# Allegro board Smart210SDK(Tiny210V2SDK)-1305-PCB.brd
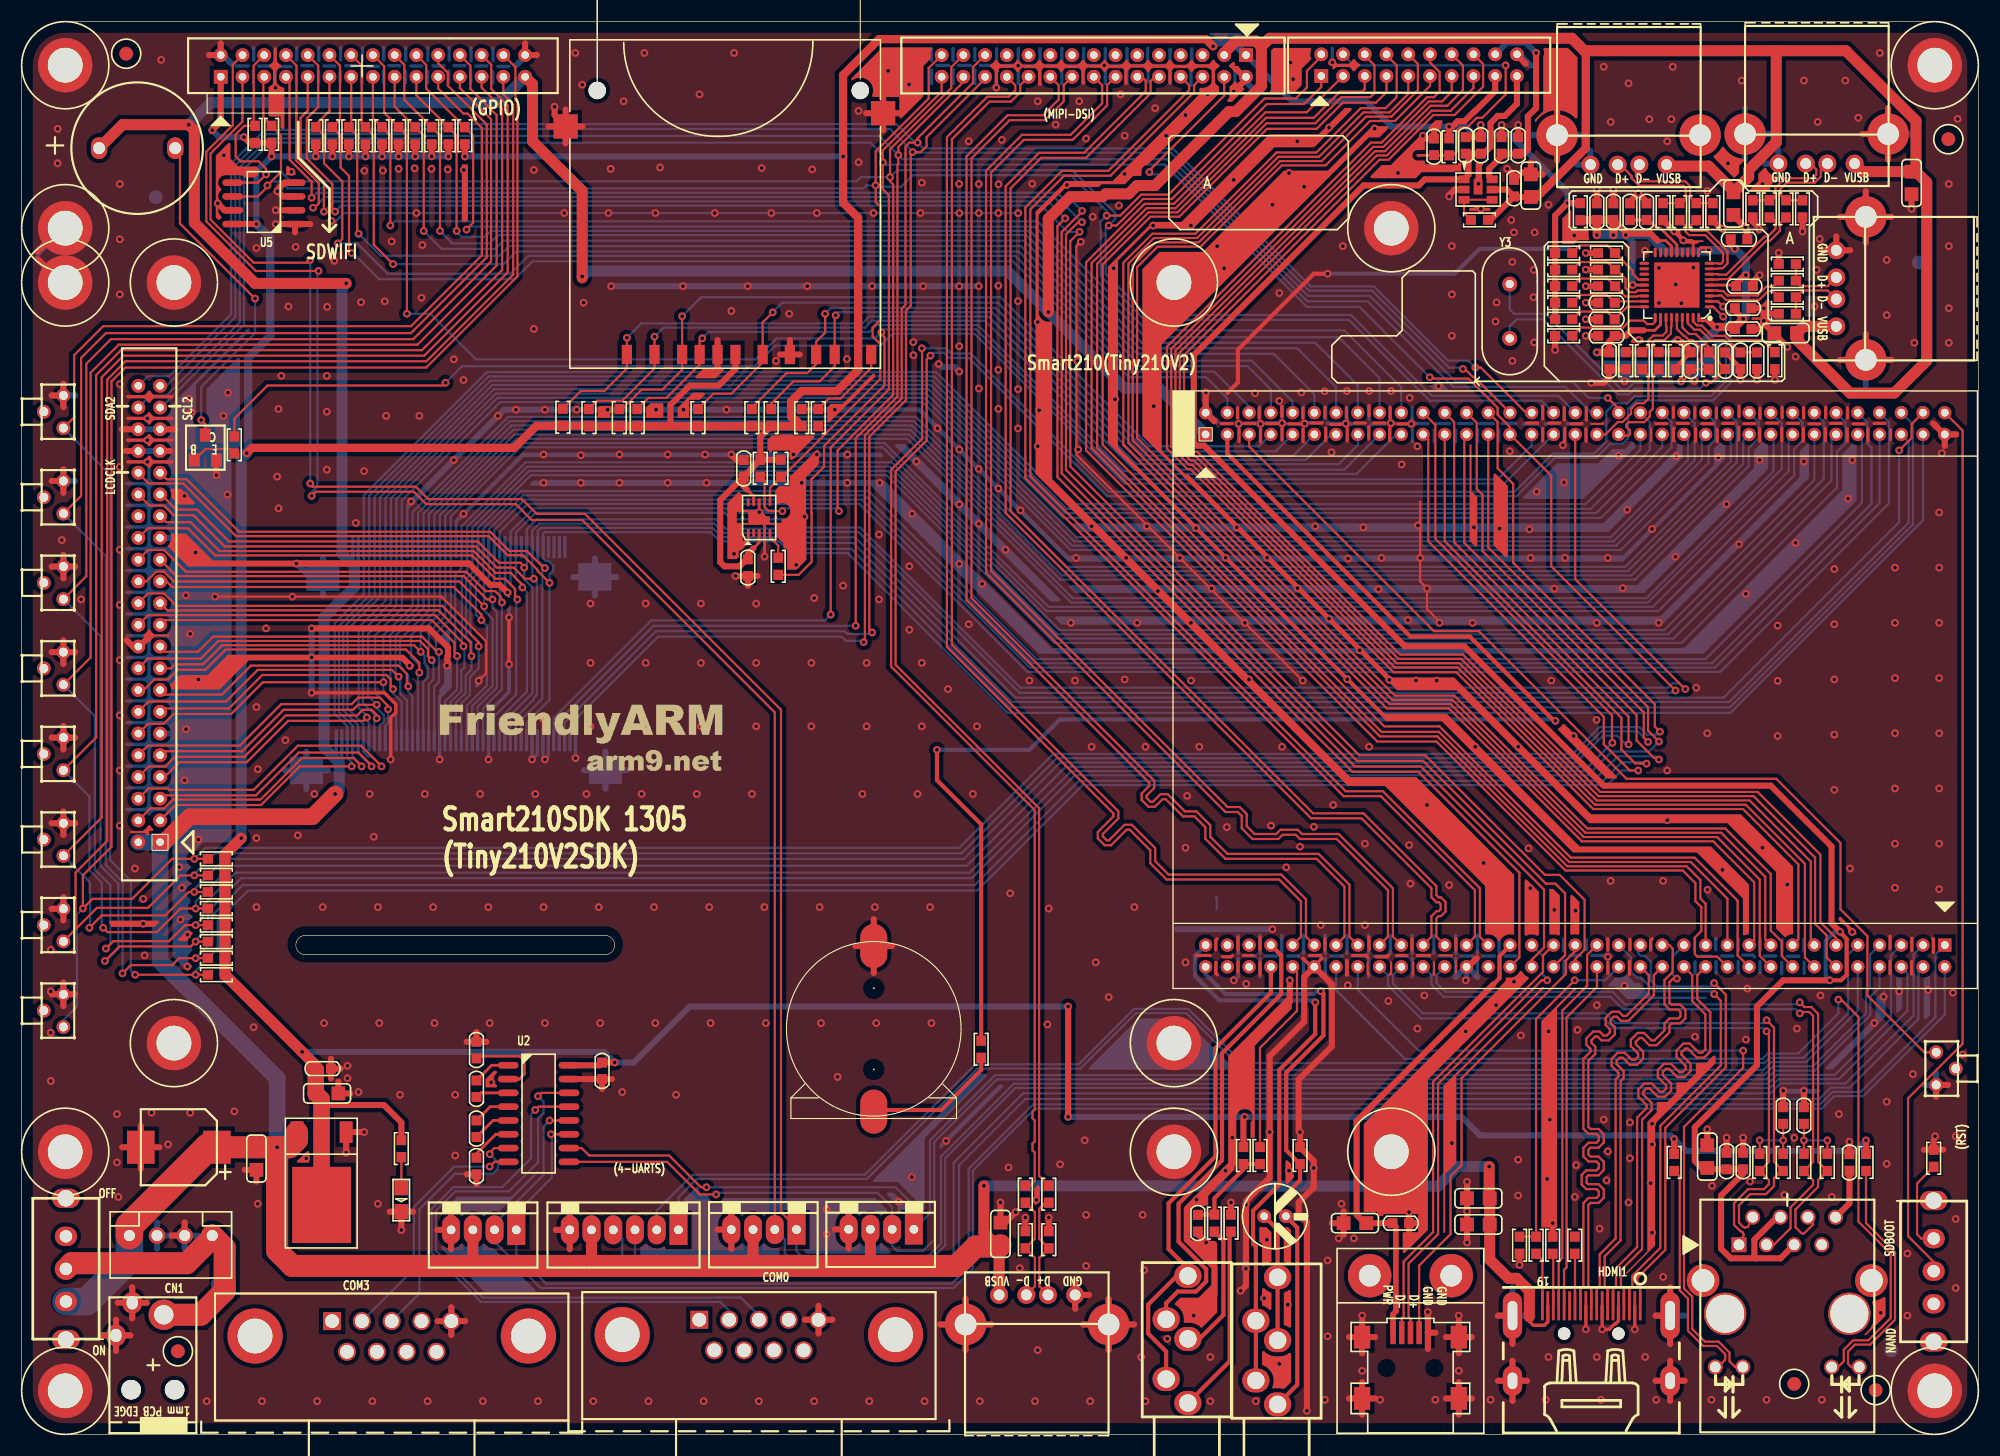
[diagram p0: board, top side]
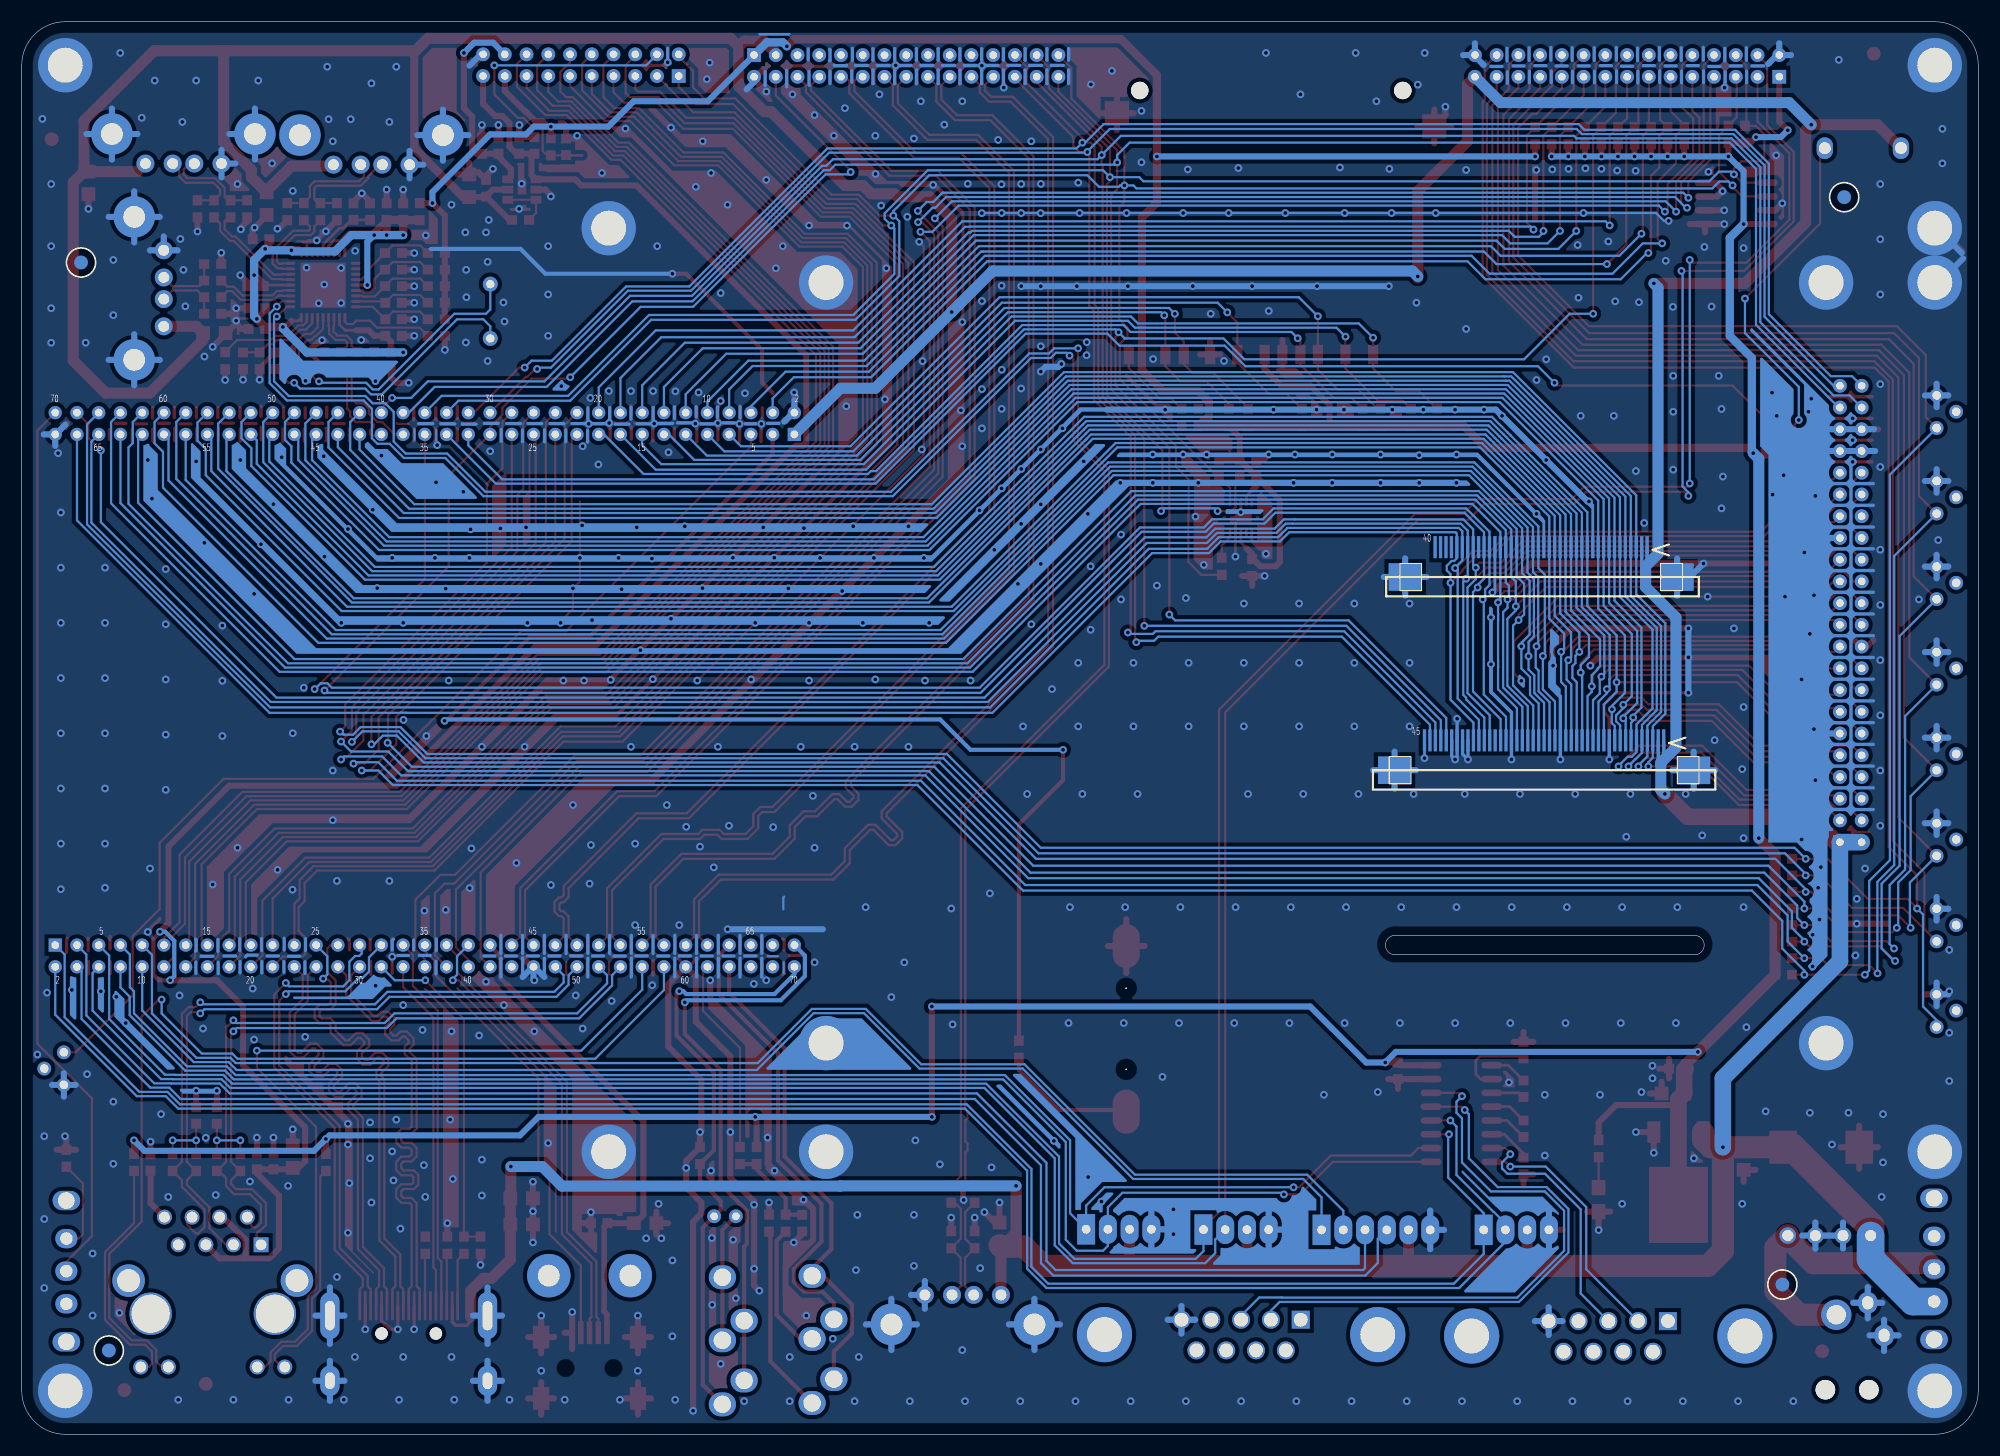
[diagram p1: board, bottom side, seen from below]

Outline 180 x 130 mm; copper layers: TOP, BOTTOM. Coordinates in mm from the lower left corner of the outline.
Outline path: 0,126 0,4 arc(1.17,1.17) 4,0 176,0 arc(178.83,1.17) 180,4 180,126 arc(178.83,128.83) 176,130 4,130 arc(1.17,128.83) 0,126 ; 26.01,45.91 53.57,45.91 arc(54.54,45.02) 53.57,44.13 26.01,44.13 arc(25.21,45.02) 26.01,45.91

## Design rules (mm)
net group DIFFPAIR50: nets XUODM XUODP
net group DIFFPAIR55: nets TD+ TD-
net group DIFFPAIR56: nets RX+ RX-
net group DM1-: nets DM1- N9765197
net group DM2-: nets DM2- N9764500
net group DM3-: nets DM3- N9764300
net group DM4-: nets DM4- N9764104
net group DP1+: nets DP1+ N9765225
net group DP2+: nets DP2+ N9764520
net group DP3+: nets DP3+ N9764304
net group DP4+: nets DP4+ N9764132
net group XUHDM: nets N9762804 XUHDM
net group XUHDP: nets N9762824 XUHDP
net group PWR: nets N9763008 VDD_1.8V VDD_2.8V VDD_3.3V VDD_5V

## Placement (name value [footprint] x y rotation side)
BT1  3V BATTERY  [BAT600]  78.38 29.69 180 top
BUZZER1  -  [SPEAKER]  7.37 118.36 0 top
C1  220uF/16V  [CAPSOP]  17.95 26.42 180 top
C2  10uF  [C0805]  21.59 26.42 270 top
C3  10uF  [C0805]  27.05 31.37 0 top
C4  104  [C0603]  26.92 33.66 0 top
C5  10uF  [C0805]  138.84 113.87 90 top
C6  104  [C0603]  137.29 113.92 90 top
C7  1uF  [C0603]  132.84 119.38 270 top
C8  104  [C0603]  134.24 119.38 270 top
C9  1uF  [C0603]  136.14 119.38 270 top
C10  104  [C0603]  137.67 119.38 270 top
C22  10uF  [C0805]  155.07 24.51 90 top
C23  104  [C0603]  156.84 24.38 90 top
C24  104  [C0603]  158.37 24.38 90 top
C25  104  [C0603]  162.05 28.57 90 top
C26  104  [C0603]  163.96 28.57 90 top
C27  104  [C0603]  168.15 24.26 90 top
C28  100pF  [C0603]  108.2 20.19 270 top
C29  104  [C0603]  66.8 80.52 270 top
C30  104  [C0603]  66.42 88.14 90 top
C51  10uF  [C0805]  123.7 19.43 180 top
C52  104  [C0603]  126.11 19.43 0 top
C54  104  [C0603]  41.83 28.88 270 top
C55  104  [C0603]  41.83 31.04 90 top
C56  104  [C0603]  41.83 36.12 270 top
C57  104  [C0603]  41.83 23.93 90 top
C58  104  [C0603]  53.39 32.69 90 top
C59  10uF  [C0805]  132.97 19.3 0 top
C60  10uF  [C0805]  132.97 21.72 0 top
C73  10u  [C0805]  90.04 17.4 90 top
C74  10u  [C0805]  157.48 114.3 270 top
C80  104  [C0603]  157.61 101.73 0 top
C81  33pF  [C0603]  153.54 98.04 90 top
C82  104  [C0603]  146.56 101.09 180 top
C83  104  [C0603]  146.56 104.14 180 top
C84  104  [C0603]  159.64 99.57 270 top
C85  104  [C0603]  146.56 102.62 180 top
C86  104  [C0603]  157.61 103.63 0 top
C87  104  [C0603]  144.91 111.76 90 top
C88  104  [C0603]  146.05 99.57 270 top
C89  104  [C0603]  157.73 105.66 0 top
C90  1uF  [C0603]  158.12 99.57 270 top
C91  104  [C0603]  149.48 111.76 90 top
C92  1uF  [C0603]  147.96 111.76 90 top
C93  1uF  [C0603]  146.43 111.76 90 top
C94  1uF  [C0603]  157.23 109.98 0 top
C95  33pF  [C0603]  156.72 98.04 90 top
C96  10u  [C0805]  173.86 116.2 270 top
C97  10u  [C0805]  163.32 101.35 180 top
C114  NC  [C0603]  129.92 119.25 270 top
CAMERA  CON20A  [IDC20S]  119.56 125 0 top
CN1  DC-JACK  [DC023B]  12.06 6.35 90 top
COM0  CONNECTOR DB9  [DB9RA_M]  67.82 10.54 90 top
COM3  CONNECTOR DB9  [DB9RA_M]  34.04 10.41 90 top
CON1  CON4  [SIP4-FA2]  46.58 18.81 180 top
CON2  CON6  [SIP6-FA2]  55.42 18.81 180 top
CON3  CON4  [SIP4-FA2]  72.36 18.84 180 top
CON4  CON4  [SIP4-FA2]  83.16 18.86 180 top
CON5  CON4  [CON4-B]  13.72 18.29 0 top
CON10  SD/MMC CARD  [SDCARD]  58.05 117.93 90 top
CON13  CON24A  [IDC30S]  98.63 125.93 180 top
CON14  CON20A  [SIP30S]  27.31 125.93 0 top
D1  LED_3.3  [LED]  34.92 22.69 270 top
H1  CON1  [H1]  4 4 0 top
H2  CON1  [H1]  4 126 0 top
H3  CON1  [H1]  176 126 0 top
H4  CON1  [H1]  176 4 0 top
H5  CON1  [H1]  4 26 0 top
H6  CON1  [H1]  106 26 0 top
H7  CON1  [H1]  4 106 0 top
H8  CON1  [H1]  4 111 0 top
H9  CON1  [H1]  14 36 0 top
H10  CON1  [H1]  14 106 0 top
H11  CON1  [H1]  106 36 0 top
H12  CON1  [H1]  126 26 0 top
H13  CON1  [H1]  106 106 0 top
H14  CON1  [H1]  126 111 0 top
HDMI1  HDMI-TypeA  [HDMI0119-20-RM-A]  144.4 9.27 0 top
K1  SW PUSHBUTTON  [KEY-A06]  2.03 94.11 270 top
K2  SW PUSHBUTTON  [KEY-A06]  2.03 86.23 270 top
K3  SW PUSHBUTTON  [KEY-A06]  2.03 78.36 270 top
K4  SW PUSHBUTTON  [KEY-A06]  2.03 70.48 270 top
K5  SW PUSHBUTTON  [KEY-A06]  2.03 62.61 270 top
K6  SW PUSHBUTTON  [KEY-A06]  2.03 54.74 270 top
K7  SW PUSHBUTTON  [KEY-A06]  2.03 46.86 270 top
K8  SW PUSHBUTTON  [KEY-A06]  2.03 38.99 270 top
K9  SW PUSHBUTTON  [KEY-A06]  177.93 33.66 90 top
LAN1  -  [HR911105A]  162.43 21.59 180 top
LCD1  LCD-888  [CON-FPC-P05-45P]  25.78 64.83 0 bottom
LCD2  LCD-888  [CON-FPC-P05-40P]  27.3 82.61 0 bottom
LCD4  CON44A  [IDC44S2]  11.56 74.04 90 top
MIC1  MIC  [MIC2]  114.3 20.07 0 top
MIC2  PHONEJACK STEREO SW  [EARJACK5]  115.44 15.62 270 top
MINIUSB1  USBOTG  [MINIUSB_ANT]  127.76 6.1 0 top
NOREF  -  [unnamed]  170.56 4.06 0 top
NOREF#2  -  [unnamed]  177.25 119.19 0 top
NOREF#3  -  [unnamed]  9.61 127.06 0 top
NOREF#4  -  [#2]  37.87 60.24 0 top
NOREF#5  -  [unnamed]  14.37 7.64 0 top
NOREF#6  -  [unnamed]  163.07 4.64 0 top
NOREF#7  -  [unnamed]  18.02 13.78 180 bottom
NOREF#8  -  [unnamed]  174.54 107.84 180 bottom
NOREF#9  -  [unnamed]  171.99 7.71 180 bottom
NOREF#10  -  [unnamed]  12.33 113.85 180 bottom
Q1  9014  [SOT-23-Q]  16.89 90.81 0 top
R2  1K  [R0603]  34.92 26.29 90 top
R3  100K  [R0603]  88.27 35.43 270 top
R4  0R  [R0603]  175.9 25.4 90 top
R5  10K  [R0603]  134.11 111.76 0 top
R6  1K  [R0603]  19.56 91.06 90 top
R9  10K  [R0603]  22.99 119.63 90 top
R10  10K  [R0603]  21.46 119.63 90 top
R13  10K  [R0603]  30.1 119.51 270 top
R14  10K  [R0603]  33.15 119.51 270 top
R18  10K  [R0603]  36.2 119.51 270 top
R19  10K  [R0603]  39.24 119.51 270 top
R20  1K  [R0603]  152.02 25.02 270 top
R21  1K  [R0603]  169.67 25.02 270 top
R23  10K  [R0603]  31.62 119.51 90 top
R24  51R  [R0603]  159.89 25.02 90 top
R25  51R  [R0603]  162.05 25.02 90 top
R26  51R  [R0603]  163.96 25.02 90 top
R28  10K  [R0603]  34.67 119.51 90 top
R29  51R  [R0603]  166.12 25.02 90 top
R31  4.7K  [R0603]  69.85 88.9 90 top
R32  4.7K  [R0603]  67.94 88.9 90 top
R33  0R  [R0603]  69.6 79.88 270 top
R34  10K  [R0603]  37.72 119.51 90 top
R35  10K  [R0603]  17.91 42.29 0 top
R37  10K  [R0603]  17.91 43.81 0 top
R38  10K  [R0603]  52.18 93.57 270 top
R39  10K  [R0603]  17.91 45.34 0 top
R40  10K  [R0603]  17.91 46.86 0 top
R41  10K  [R0603]  62.21 93.57 270 top
R42  10K  [R0603]  54.97 93.57 270 top
R43  10K  [R0603]  17.91 48.39 180 top
R47  0R  [R0603]  117.6 25.65 90 top
R48  0R  [R0603]  111.25 19.43 90 top
R52  0R  [R0603]  109.73 19.43 270 top
R54  470K  [R0603]  112.39 25.65 90 top
R55  100R  [R0603]  113.92 25.65 270 top
R60  10K  [R0603]  40.77 119.51 90 top
R64  10K  [R0603]  17.91 49.91 180 top
R65  10K  [R0603]  17.91 51.44 180 top
R66  10K  [R0603]  17.91 52.96 180 top
R71  10K  [R0603]  56.63 93.57 270 top
R72  10K  [R0603]  68.94 93.57 270 top
R73  10K  [R0603]  67.17 93.57 270 top
R74  10K  [R0603]  49.78 93.6 270 top
R75  0R  [R0603]  140.84 17.4 90 top
R76  1K  [R0603]  139.32 17.4 90 top
R77  20K  [R0603]  137.79 17.4 90 top
R78  NC  [R0603]  73.28 93.57 270 top
R79  NC  [R0603]  142.88 17.4 90 top
R80  NC  [R0603]  71.75 93.57 270 top
R82  0R  [R0603]  150.62 98.81 270 top
R84  10K  [R0603]  28.57 119.51 90 top
R88  10K  [R0603]  27.05 119.51 270 top
R89  22R  [R0603]  92.33 22.1 270 top
R90  22R  [R0603]  94.49 22.1 270 top
R91  15K  [R0603]  92.33 17.91 90 top
R92  15K  [R0603]  94.49 17.91 90 top
R93  22R  [R0603]  154.05 112.52 90 top
R94  22R  [R0603]  152.53 112.52 90 top
R95  15K  [R0603]  155.57 112.52 270 top
R96  0R  [R0603]  149.1 98.81 270 top
R97  15K  [R0603]  151 112.52 270 top
R98  22R  [R0603]  162.31 112.78 90 top
R99  22R  [R0603]  160.78 112.78 90 top
R100  15K  [R0603]  163.83 112.78 270 top
R101  15K  [R0603]  159.26 112.78 270 top
R107  NC  [R0603]  141.86 107.19 180 top
R108  NC  [R0603]  141.86 108.71 180 top
R109  15K  [R0603]  162.43 103.12 180 top
R110  22R  [R0603]  162.43 104.65 0 top
R111  10K  [R0603]  141.86 101.09 0 top
R112  22R  [R0603]  162.43 106.17 0 top
R113  15K  [R0603]  162.43 107.7 180 top
R114  10K  [R0603]  141.86 104.14 180 top
R115  10K  [R0603]  145.8 105.66 0 top
R116  10K  [R0603]  145.8 107.19 0 top
R117  10K  [R0603]  145.8 108.71 0 top
R118  0R  [R0603]  143.38 112.52 90 top
R119  0R  [R0603]  141.86 102.62 180 top
R121  12K,1%  [R0603]  161.29 98.81 270 top
R128  1M  [R0603]  155.19 98.81 90 top
R129  NC  [R0603]  141.86 105.66 180 top
R130  NC  [R0603]  152.15 98.81 270 top
R131  NC  [R0603]  147.57 98.81 270 top
R147  NC  [R0603]  131.32 118.49 270 top
S1  SWITH-5P  [SW35]  4.06 15.24 270 top
S2  SWITH-5P  [SW35]  175.9 14.99 90 top
SMART210(TINY210V2)  Tiny210V2  [TINYPRO]  105.92 41.02 0 top
SPK1  PHONEJACK STEREO SW  [EARJACK5]  107.19 15.75 270 top
U1  AMS1086CD-3.3  [TO-252]  29.84 27.81 180 top
U2  SP3232  [SOP16]  44.75 33.96 0 top
U5  AT24LC04  [SOP8]  25.15 111.38 180 top
U6  RT9011-MGPJ6  [SOT-23-6]  133.99 114.55 270 top
U7  MMA7660FC  [DFN10-19P7X111-2TH]  67.84 84.37 0 top
U11  USB2514B_QFN36_MIN  [QFN36-19P7]  152.27 105.77 180 top
USBH1  USB  A  [USB-A2]  89.92 12.83 180 top
USBH2  USB  A  [USB-A2]  151.32 116.85 0 top
USBH3  USB  A  [USB-A2]  168.62 116.95 0 top
USBH4  USB  A  [USB-A2]  166.94 101.97 270 top
Y3  24MHz  [OSC2PR-1]  136.89 105.79 270 top

## Library data of the parts
BT1 = BATTERY_0
BUZZER1 = SPEAKER
C1 C22 C51 = CAP
C2-C10 C23-C30 C52 C54-C60 C73 C74 C80 C82-C89 C91 C96 C97 C114 = CAP NP
C81 C94 C95 = C
C90 C92 = 1.0uF-6.3V-10%-X5R-0402
C93 = 1.0uF-16V-10%-X5R-0603
CAMERA = CON20A
CN1 = DC-JACK_1
COM0 COM3 = CONNECTOR DB9_2
CON1 CON3-CON5 = CON4
CON2 = CON6
CON10 = SD_0
CON13 = CON24A_0
CON14 = CON20A_2
D1 = LED
H1-H14 = CON1
HDMI1 = HDMI-TypeA_3
K1-K9 = SW PUSHBUTTON_0
LAN1 = HR911105A
LCD1 = LCD-888_1
LCD2 = LCD-888_4
LCD4 = CON40A_0
MIC1 = MIC
MIC2 SPK1 = PHONEJACK STEREO SW
MINIUSB1 = USB_A/B_2
Q1 = NPN
R2-R6 R9 R10 R13 R14 R18-R21 R23-R26 R28 R29 R31-R35 R37-R43 R47 R48 R52 R54 R55 R60 R64-R66 R71-R80 R84 R88 R91 R92 R95 R97 R100 R101 R107-R109 R111 R113-R119 R128-R131 = R
R82 R96 = R: signal model: R_R0603_0R_0R
R89 R90 R93 R94 R98 R99 R110 R112 = R: signal model: R_R0603_22R_22R
R121 = 12.0K-1/16W-1%-0603
R147 = RESISTOR
S1 S2 = SWITH-5P
SMART210(TINY210V2) = TINY210PRO
U1 = AMS1117
U2 = SP3232
U5 = AT24LC04
U6 = RT9011
U7 = MMA7660FC
U11 = USB2514B_QFN36_MIN
USBH1-USBH4 = USBPORT_0
Y3 = CRYSTAL

## Footprints (pads in the part's own frame, mm; a bottom-side part is the same pattern mirrored in y, then rotated)
BAT600
  oval 2.489x4.064 smd: 1(0,0) 2(0,-15.24)
  round 0.127 hole 1.194: 3(0,-3.886) 4(0,-11.354)
C0603
  rect 0.914x0.914 smd: 1(0,0) 2(1.524,0)
C0805
  rect 1.27x1.27 smd: 1(0,0) 2(2.083,0)
CAPSOP
  rect 2.54x3.048 smd: 1(0,0) 2(7,0)
CON4-B
  round 1.524 hole 1.016: 1(-3.81,0) 2(-1.27,0) 3(1.27,0) 4(3.81,0)
CON-FPC-P05-40P
  rect 0.305x2.032 smd: 1(3.16,0.968) 2(3.66,0.968) 3(4.16,0.968) 4(4.66,0.968) 5(5.16,0.968) 6(5.66,0.968) 7(6.16,0.968) 8(6.661,0.968) 9(7.161,0.968) 10(7.661,0.968) 11(8.161,0.968) 12(8.661,0.968) 13(9.161,0.968) 14(9.661,0.968) 15(10.161,0.968) 16(10.662,0.968) 17(11.162,0.968) 18(11.662,0.968) 19(12.162,0.968) 20(12.662,0.968) 21(13.162,0.968) 22(13.662,0.968) 23(14.163,0.968) 24(14.663,0.968) 25(15.163,0.968) 26(15.663,0.968) 27(16.163,0.968) 28(16.663,0.968) 29(17.163,0.968) 30(17.663,0.968) 31(18.163,0.968) 32(18.664,0.968) 33(19.164,0.968) 34(19.664,0.968) 35(20.164,0.968) 36(20.664,0.968) 37(21.164,0.968) 38(21.664,0.968) 39(22.164,0.968) 40(22.665,0.968)
  rect 3.048x2.54 smd: A(0.399,3.726) B(25.42,3.714)
CON-FPC-P05-45P
  rect 0.305x2.032 smd: 1(3.16,0.968) 2(3.66,0.968) 3(4.16,0.968) 4(4.66,0.968) 5(5.16,0.968) 6(5.66,0.968) 7(6.16,0.968) 8(6.661,0.968) 9(7.161,0.968) 10(7.661,0.968) 11(8.161,0.968) 12(8.661,0.968) 13(9.161,0.968) 14(9.661,0.968) 15(10.161,0.968) 16(10.662,0.968) 17(11.162,0.968) 18(11.662,0.968) 19(12.162,0.968) 20(12.662,0.968) 21(13.162,0.968) 22(13.662,0.968) 23(14.163,0.968) 24(14.663,0.968) 25(15.163,0.968) 26(15.663,0.968) 27(16.163,0.968) 28(16.663,0.968) 29(17.163,0.968) 30(17.663,0.968) 31(18.163,0.968) 32(18.664,0.968) 33(19.164,0.968) 34(19.664,0.968) 35(20.164,0.968) 36(20.664,0.968) 37(21.164,0.968) 38(21.664,0.968) 39(22.164,0.968) 40(22.665,0.968) 41(23.165,0.968) 42(23.665,0.968) 43(24.165,0.968) 44(24.665,0.968) 45(25.165,0.968)
  rect 3.048x2.54 smd: A(0.399,3.726) B(27.92,3.714)
DB9RA_M
  rect 1.651x1.651 hole 1.27: 1(0,5.486)
  round 1.651 hole 1.27: 2(0,2.743) 3(0,0) 4(0,-2.743) 5(0,-5.486) 6(-2.819,4.115) 7(-2.819,1.372) 8(-2.819,-1.372) 9(-2.819,-4.115)
  round 5.08 hole 3.2: 10(-1.372,12.573) 11(-1.372,-12.573)
DC023B
  round 1.803 hole 1.803 unplated: (-2.25,2) (-2.25,-2)
  round 2.794 hole 1.778: 1(4.65,-1)
  oval 1.981x1.778 hole 1.219x1.016: 2(5.75,1.9) 3(2.75,3.4)
DFN10-19P7X111-2TH
  rect 0.254x0.711 smd: 1(-1,-1.412) 2(-0.5,-1.412) 3(0,-1.412) 4(0.5,-1.412) 5(1,-1.412) 6(1,1.412) 7(0.5,1.412) 8(0,1.412) 9(-0.5,1.412) 10(-1,1.412)
  rect 0.3x0.254 smd: M1(1.524,0) M2(-1.524,0)
EARJACK5
  oval 2.2x2.5 hole 1.6: 1(5.17,-1.904) 2(6.97,0.096) 3(1.17,0.096) 4(10.669,-1.904) 5(12.87,0.096)
H1
  round 5 hole 3.2: 1(0,0)
HDMI0119-20-RM-A
  round 1.143 hole 1.143 unplated: (-2.5,0) (2.5,0)
  rect 0.254x2.667 smd: 1(4.5,2.55) 2(4,2.55) 3(3.5,2.55) 4(3,2.55) 5(2.5,2.55) 6(2,2.55) 7(1.5,2.55) 8(1,2.55) 9(0.5,2.55) 10(0,2.55) 11(-0.5,2.55) 12(-1,2.55) 13(-1.5,2.55) 14(-2,2.55) 15(-2.5,2.55) 16(-3,2.55) 17(-3.5,2.55) 18(-4,2.55) 19(-4.5,2.55)
  oval 1.778x4.318 hole 0.889x2.692: 20(-7.25,1.65) 21(7.25,1.65)
  oval 1.778x2.794 hole 0.889x1.524: 22(-7.25,-4.35) 23(7.25,-4.35)
HR911105A
  round 3.9 hole 3.5 unplated: (-5.707,10.498) (5.723,10.498)
  rect 1.372x1.372 hole 0.991: 1(4.453,4.148)
  round 1.372 hole 0.991: 2(3.183,1.608) 3(1.913,4.148) 4(0.643,1.608) 5(-0.627,4.148) 6(-1.897,1.608) 7(-3.167,4.148) 8(-4.437,1.608) 9(6.633,15.398) 10(4.093,15.398) 11(-4.077,15.398) 12(-6.617,15.398)
  round 2.997 hole 2.1: M3(-7.737,7.448) M4(7.753,7.448)
IDC20S
  rect 1.27x1.27 hole 0.7: 1(0,0)
  round 1.27 hole 0.7: 2(0,2) 3(2,0) 4(2,2) 5(4,0) 6(4,2) 7(6,0) 8(6,2) 9(8,0) 10(8,2) 11(10,0) 12(10,2) 13(12,0) 14(12,2) 15(14,0) 16(14,2) 17(16,0) 18(16,2) 19(18,0) 20(18,2)
IDC30S
  rect 1.27x1.27 hole 0.7: 1(-14,-1)
  round 1.27 hole 0.7: 2(-14,1) 3(-12,-1) 4(-12,1) 5(-10,-1) 6(-10,1) 7(-8,-1) 8(-8,1) 9(-6,-1) 10(-6,1) 11(-4,-1) 12(-4,1) 13(-2,-1) 14(-2,1) 15(0,-1) 16(0,1) 17(2,-1) 18(2,1) 19(4,-1) 20(4,1) 21(6,-1) 22(6,1) 23(8,-1) 24(8,1) 25(10,-1) 26(10,1) 27(12,-1) 28(12,1) 29(14,-1) 30(14,1)
IDC44S2
  rect 1.27x1.27 hole 0.7: 1(-19.547,-1.17)
  round 1.27 hole 0.7: 2(-19.547,0.83) 3(-17.547,-1.17) 4(-17.547,0.83) 5(-15.547,-1.17) 6(-15.547,0.83) 7(-13.547,-1.17) 8(-13.547,0.83) 9(-11.547,-1.17) 10(-11.547,0.83) 11(-9.547,-1.17) 12(-9.547,0.83) 13(-7.547,-1.17) 14(-7.547,0.83) 15(-5.547,-1.17) 16(-5.547,0.83) 17(-3.547,-1.17) 18(-3.547,0.83) 19(-1.547,-1.17) 20(-1.547,0.83) 21(0.453,-1.17) 22(0.453,0.83) 23(2.453,-1.17) 24(2.453,0.83) 25(4.453,-1.17) 26(4.453,0.83) 27(6.453,-1.17) 28(6.453,0.83) 29(8.453,-1.17) 30(8.453,0.83) 31(10.453,-1.17) 32(10.453,0.83) 33(12.453,-1.17) 34(12.453,0.83) 35(14.453,-1.17) 36(14.453,0.83) 37(16.453,-1.17) 38(16.453,0.83) 39(18.453,-1.17) 40(18.453,0.83) 41(20.453,-1.17) 42(20.453,0.83) 43(22.453,-1.17) 44(22.453,0.83)
KEY-A06
  round 1.27 hole 0.787: 1(1.5,1.8) 2(-1.5,1.8) 3(0,0)
LED
  rect 1.4x1.27 smd: 1(-0.002,0.008) 2(2.207,0.008)
MIC2
  round 1.27 hole 0.711: 1(0,0) 2(2,0)
MINIUSB_ANT
  round 4 hole 2 unplated: (-3.75,8.5) (3.75,8.5)
  round 0 hole 0.889 unplated: (-2.2,0) (2.2,0)
  rect 0.508x2.108 smd: 1(-1.6,3.25) 2(-0.8,3.25) 3(0,3.25) 4(0.8,3.25) 5(1.6,3.25)
  rect 1.499x2.108 smd: 6(4.45,2.85) 7(-4.45,2.85) 8(-4.45,-2.8) 9(4.45,-2.8)
OSC2PR-1
  round 1.372 hole 0.762: 1(-0.064,0) 2(4.94,0)
QFN36-19P7
  oval 0.889x0.279 smd: 1(-3,2) 2(-3,1.5) 3(-3,1) 4(-3,0.5) 5(-3,0) 6(-3,-0.5) 7(-3,-1) 8(-3,-1.5) 9(-3,-2) 19(3,-2) 20(3,-1.5) 21(3,-1) 22(3,-0.5) 23(3,0) 24(3,0.5) 25(3,1) 26(3,1.5) 27(3,2)
  oval 0.279x0.889 smd: 10(-2,-3) 11(-1.5,-3) 12(-1,-3) 13(-0.5,-3) 14(0,-3) 15(0.5,-3) 16(1,-3) 17(1.5,-3) 18(2,-3) 28(2,3) 29(1.5,3) 30(1,3) 31(0.5,3) 32(0,3) 33(-0.5,3) 34(-1,3) 35(-1.5,3) 36(-2,3)
  rect 4.166x4.166 smd: 37(0,0)
R0603
  rect 0.94x0.889 smd: 1(-0.787,0) 2(0.787,0)
SDCARD
  round 1.6 hole 1.6 unplated: (5.748,5.104) (5.748,-19.095)
  rect 1.778x0.94 smd: 1(-18.552,-0.168) 2(-18.552,-2.708) 3(-18.552,-5.967) 4(-18.552,-7.612) 5(-18.552,-10.119) 6(-18.552,-12.619) 7(-18.552,-15.039) 8(-18.552,-16.744) 9(-18.552,2.372) 10(-18.552,-20.104) 11(-18.552,-4.316)
  rect 2.235x2.235 smd: 12(2.438,8.009) 13(3.652,-21.199)
SIP4-FA2
  rect 1.651x2.8 hole 0.8: 1(1.08,0)
  oval 1.651x2.667 hole 0.8: 2(3.08,0) 3(5.08,0) 4(7.08,0)
SIP6-FA2
  rect 1.651x2.8 hole 0.8: 1(-5,0)
  oval 1.651x2.667 hole 0.8: 2(-3,0) 3(-1,0) 4(1,0) 5(3,0) 6(5,0)
SIP30S
  rect 1.27x1.27 hole 0.7: 1(-9,-1)
  round 1.27 hole 0.7: 2(-9,1) 3(-7,-1) 4(-7,1) 5(-5,-1) 6(-5,1) 7(-3,-1) 8(-3,1) 9(-1,-1) 10(-1,1) 11(1,-1) 12(1,1) 13(3,-1) 14(3,1) 15(5,-1) 16(5,1) 17(7,-1) 18(7,1) 19(9,-1) 20(9,1) 21(11,-1) 22(11,1) 23(13,-1) 24(13,1) 25(15,-1) 26(15,1) 27(17,-1) 28(17,1) 29(19,-1) 30(19,1)
SOP8
  oval 1.905x0.61 smd: 1(0,0) 2(0,-1.27) 3(0,-2.54) 4(0,-3.81) 5(5.74,-3.81) 6(5.74,-2.54) 7(5.74,-1.27) 8(5.74,0)
SOP16
  oval 1.905x0.61 smd: 1(0,0) 2(0,-1.27) 3(0,-2.54) 4(0,-3.81) 5(0,-5.08) 6(0,-6.35) 7(0,-7.62) 8(0,-8.89) 9(5.588,-8.89) 10(5.588,-7.62) 11(5.588,-6.35) 12(5.588,-5.08) 13(5.588,-3.81) 14(5.588,-2.54) 15(5.588,-1.27) 16(5.588,0)
SOT-23-6
  rect 0.711x1.016 smd: 1(-0.94,-1.295) 2(0,-1.295) 3(0.94,-1.295) 4(0.94,1.295) 5(0,1.295) 6(-0.94,1.295)
SOT-23-Q
  rect 1.016x1.219 smd: B(-1.016,-1.143) C(0,1.143) E(1.016,-1.143)
SPEAKER
  oval 1.5x2 hole 1.1: 1(-0.254,0) 2(6.754,0)
SW35
  oval 1.778x2.54 hole 1.524: 1(-6.477,0) 5(6.523,0)
  oval 1.778x2.032 hole 1.143: 2(-2.977,0) 3(0.023,0) 4(3.023,0)
TINYPRO
  rect 1.219x1.219 hole 0.711: A1(3,51) B1(71,4)
  round 1.219 hole 0.711: A2(3,53) A3(5,51) A4(5,53) A5(7,51) A6(7,53) A7(9,51) A8(9,53) A9(11,51) A10(11,53) A11(13,51) A12(13,53) A13(15,51) A14(15,53) A15(17,51) A16(17,53) A17(19,51) A18(19,53) A19(21,51) A20(21,53) A21(23,51) A22(23,53) A23(25,51) A24(25,53) A25(27,51) A26(27,53) A27(29,51) A28(29,53) A29(31,51) A30(31,53) A31(33,51) A32(33,53) A33(35,51) A34(35,53) A35(37,51) A36(37,53) A37(39,51) A38(39,53) A39(41,51) A40(41,53) A41(43,51) A42(43,53) A43(45,51) A44(45,53) A45(47,51) A46(47,53) A47(49,51) A48(49,53) A49(51,51) A50(51,53) A51(53,51) A52(53,53) A53(55,51) A54(55,53) A55(57,51) A56(57,53) A57(59,51) A58(59,53) A59(61,51) A60(61,53) A61(63,51) A62(63,53) A63(65,51) A64(65,53) A65(67,51) A66(67,53) A67(69,51) A68(69,53) A69(71,51) A70(71,53) B2(71,2) B3(69,4) B4(69,2) B5(67,4) B6(67,2) B7(65,4) B8(65,2) B9(63,4) B10(63,2) B11(61,4) B12(61,2) B13(59,4) B14(59,2) B15(57,4) B16(57,2) B17(55,4) B18(55,2) B19(53,4) B20(53,2) B21(51,4) B22(51,2) B23(49,4) B24(49,2) B25(47,4) B26(47,2) B27(45,4) B28(45,2) B29(43,4) B30(43,2) B31(41,4) B32(41,2) B33(39,4) B34(39,2) B35(37,4) B36(37,2) B37(35,4) B38(35,2) B39(33,4) B40(33,2) B41(31,4) B42(31,2) B43(29,4) B44(29,2) B45(27,4) B46(27,2) B47(25,4) B48(25,2) B49(23,4) B50(23,2) B51(21,4) B52(21,2) B53(19,4) B54(19,2) B55(17,4) B56(17,2) B57(15,4) B58(15,2) B59(13,4) B60(13,2) B61(11,4) B62(11,2) B63(9,4) B64(9,2) B65(7,4) B66(7,2) B67(5,4) B68(5,2) B69(3,4) B70(3,2)
TO-252
  rect 1.194x1.981 smd: 1(0,0) 2(2.261,0) 3(4.521,0)
  rect 5.41x7.01 smd: 4(2.261,6.706)
unnamed
  round 1.27 smd: (0,0)
USB-A2
  round 1.651 hole 1: 1(0,0) 2(-2.504,0) 3(-4.498,0) 4(-7,0)
  round 3.81 hole 2: 5(3.084,2.718) 6(-10.074,2.718)

## Nets
DGND: BT1.2(-) C1.2 C2.2 C3.2 C4.2 C5.2 C6.2 C7.1 C8.1 C9.1 C10.1 C22.2 C23.2 C24.2 C25.2 C26.2 C27.2 C28.2 C29.2 C30.2 C51.2 C52.2 C56.1 C57.1 C58.1 C59.1 C60.1 C73.2 C74.2 C80.2 C81.2 C82.2 C83.2 C84.2 C85.2 C86.2 C87.2 C88.2 C89.2 C90.2 C91.2 C92.2 C93.2 C94.2 C95.2 C96.2 C97.2 C114.1 CAMERA.20 CN1.2 CN1.3 COM0.5 COM3.5 CON1.4 CON2.6 CON3.4 CON4.4 CON5.2 CON5.3 CON10.3(GND2) CON10.6(GND1) CON10.12(PAD1) CON10.13(PAD2) CON13.2 CON14.2 CON14.30 D1.2(CATHODE) H1.1 H2.1 H3.1 H4.1 H5.1 H6.1 H7.1 H8.1 H9.1 H10.1 H11.1 H12.1 H13.1 H14.1 HDMI1.2(TMDS DATA2 SHIELD) HDMI1.5(TMDS DATA1 SHIELD) HDMI1.8(TMDS DATA0 SHIELD) HDMI1.11(TMDS CLOCK SHIELD) HDMI1.20(SHELL1) HDMI1.21(SHELL2) HDMI1.22(SHELL3) HDMI1.23(SHELL4) K1.2 K2.2 K3.2 K4.2 K5.2 K6.2 K7.2 K8.2 K9.2 LCD1.11(GND1) LCD1.20(GND2) LCD1.29(GND3) LCD1.37(GND4) LCD1.38(GND5) LCD1.39(GND6) LCD1.40(GND7) LCD1.45(GND8) LCD1.A LCD1.B LCD2.11(GND1) LCD2.20(GND2) LCD2.29(GND3) LCD2.A LCD2.B LCD4.11 LCD4.20 LCD4.29 LCD4.37 LCD4.38 LCD4.39 LCD4.40 MINIUSB1.5(GND) MINIUSB1.6(#6) MINIUSB1.7(#7) MINIUSB1.8(#8) MINIUSB1.9(#9) Q1.E R4.2 R47.2 R48.2 R75.2 R77.1 R91.2 R92.2 R95.2 R97.2 R100.2 R101.2 R109.2 R111.1 R113.2 R115.1 R116.1 R117.1 R121.2 R130.2 R131.2 SMART210(TINY210V2).A2 SMART210(TINY210V2).A69 SMART210(TINY210V2).B46 SMART210(TINY210V2).B60 U1.1(GND) U2.15(VSS) U5.1(A0) U5.2(A1) U5.3(A2) U5.4(GND) U5.7(WP) U6.2(GND) U7.1(RESERVED1) U7.4(AVSS) U7.8(DVSS) U11.11(TEST) U11.37(VSS(FLAG)) USBH1.4(GND1) USBH1.5(GND3) USBH1.6(GND2) USBH2.4(GND1) USBH2.6(GND2) USBH3.4(GND1) USBH3.5(GND3) USBH3.6(GND2) USBH4.4(GND1) USBH4.5(GND3) USBH4.6(GND2)
VDD_1.8V: C7.2 C8.2 C22.1 C23.1 C24.1 CAMERA.19 LAN1.4(CT2) LAN1.5(CT1) U6.1(VOUT2)
VDD_2.8V: C9.2 C10.2 CAMERA.18 U6.6(VOUT1)
VDD_3.3V: C3.1 C4.1 C29.1 C30.1 C58.2 CAMERA.17 CON10.4(VDD) CON13.1 CON14.1 R2.2 R9.1 R10.1 R13.2 R14.2 R18.2 R19.2 R20.1 R21.1 R23.1 R28.1 R31.2 R32.2 R34.1 R35.2 R37.2 R38.2 R39.2 R40.2 R41.2 R42.2 R43.1 R54.2 R60.1 R64.1 R65.1 R66.1 R71.2 R72.2 R73.2 R74.2 R80.2 R84.1 R88.2 R107.2 R108.2 R114.2 R118.2 R119.2 R129.2 R147.1 U1.2(VOUT) U1.4(TAB) U2.16(VDD) U5.8(VDD) U7.3(AVDD) U7.9(DVDD)
VDD_5V: BUZZER1.1 C1.1 C2.1 C5.1 C6.1 C59.2 C60.2 C73.1 C74.1 C96.1 C97.1 CON1.3 CON2.5 CON3.3 CON4.3 CON5.1 CON13.3 CON14.29 HDMI1.18(+5V POWER) LCD1.1(VDD5V_1) LCD1.2(VDD5V_2) LCD2.1(VDD5V_1) LCD2.2(VDD5V_2) LCD4.1 LCD4.2 R5.2 S1.4 SMART210(TINY210V2).A1 U1.3(VIN) U6.5(VIN) USBH1.1(VBUS) USBH2.1(VBUS) USBH3.1(VBUS) USBH4.1(VBUS)
VDD_RTC_AP: R3.1 SMART210(TINY210V2).A3
BOOT_CS: S2.3 SMART210(TINY210V2).A70
CAM_A_CLKENB: CAMERA.5 SMART210(TINY210V2).B23
CAM_A_D0: CAMERA.16 SMART210(TINY210V2).B11
CAM_A_D1: CAMERA.15 SMART210(TINY210V2).B12
CAM_A_D2: CAMERA.14 SMART210(TINY210V2).B13
CAM_A_D3: CAMERA.13 SMART210(TINY210V2).B14
CAM_A_D4: CAMERA.12 SMART210(TINY210V2).B15
CAM_A_D5: CAMERA.11 SMART210(TINY210V2).B16
CAM_A_D6: CAMERA.10 SMART210(TINY210V2).B17
CAM_A_D7: CAMERA.9 SMART210(TINY210V2).B18
CAM_A_FIELD: CAMERA.3 SMART210(TINY210V2).B22
CAM_A_HREF: CAMERA.6 SMART210(TINY210V2).B21
CAM_A_PCLK: CAMERA.8 SMART210(TINY210V2).B19
CAM_A_RESET: C114.2 CAMERA.4 R147.2
CAM_A_VSYNC: CAMERA.7 SMART210(TINY210V2).B20
DE: LCD1.33(VDEN) LCD2.33(VDEN) LCD4.33 SMART210(TINY210V2).A68
DM1-: R89.1 U11.1(USBDN1_DM)
DM2-: R110.1 U11.3(USBDN2_DM)
DM3-: R98.1 U11.6(USBDN3_DM)
DM4-: R93.1 U11.8(USBDN4_DM)
DM9000_LANLED: LAN1.11(LEDY-) SMART210(TINY210V2).B58
DM9000_LINKLED: LAN1.10(LEDG-) SMART210(TINY210V2).B56
DP1+: R90.1 U11.2(USBDN1_DP)
DP2+: R112.1 U11.4(USBDN2_DP)
DP3+: R99.1 U11.7(USBDN3_DP)
DP4+: R94.1 U11.9(USBDN4_DP)
HP-L: SMART210(TINY210V2).B64 SPK1.3(C) SPK1.4(D)
HP-P: SMART210(TINY210V2).B63 SPK1.1(A)
HP_DETECT: R55.1 SMART210(TINY210V2).B62
HS: LCD1.35(HSYNC) LCD2.35(HSYNC) LCD4.35 SMART210(TINY210V2).A66
HS_IND/CFG_SEL1: R115.2 R129.1 U11.25(HS_IND/CFG_SEL1)
LCDCLK: LCD1.36(VCLK) LCD2.36(VCLK) LCD4.36 SMART210(TINY210V2).A67
LOCAL_PWR: R111.2 U11.28(SUSP_IND/LOCAL_PWR/NON_REM0)
M_NRESET: K9.1 SMART210(TINY210V2).A5
MICN: MIC1.2 MIC2.5(E) R47.1 SMART210(TINY210V2).B70
MICP: MIC2.1(A) MIC2.4(D) SMART210(TINY210V2).B69
NAND: S2.2
NRESET: C83.1 R114.1 U11.26(R\E\S\E\T\)
RBIAS: R121.1 U11.35(RBIAS)
RSRXD0: COM0.2 U2.13(RIN1)
RSRXD3: COM3.2 U2.8(RIN2)
RSTXD0: COM0.3 U2.14(T1OUT)
RSTXD3: COM3.3 U2.7(T2OUT)
RX+: LAN1.3(RX+) R26.1 SMART210(TINY210V2).B50
RX-: LAN1.6(RX-) R29.1 SMART210(TINY210V2).B48
SCL/CFG_SEL0: R107.1 R116.2 U11.24(SCL/SMBCLK/CFG_SEL0)
SD: R4.1 S2.4
SDA: R108.1 R117.2 U11.22(SDA/SMBDATA/NON_REM1)
SPK_OUT_LN: SMART210(TINY210V2).B66
SPK_OUT_LP: SMART210(TINY210V2).B65
SPK_OUT_RN: SMART210(TINY210V2).B68
SPK_OUT_RP: SMART210(TINY210V2).B67
TD+: LAN1.1(TD+) R24.1 SMART210(TINY210V2).B54
TD-: LAN1.2(TD-) R25.1 SMART210(TINY210V2).B52
VD0: LCD1.3(VD0) LCD2.3(VD0) LCD4.3 SMART210(TINY210V2).A41
VD1: LCD1.4(VD1) LCD2.4(VD1) LCD4.4 SMART210(TINY210V2).A42
VD2: LCD1.5(VD2) LCD2.5(VD2) LCD4.5 SMART210(TINY210V2).A43
VD3: LCD1.6(VD3) LCD2.6(VD3) LCD4.6 SMART210(TINY210V2).A44
VD4: LCD1.7(VD4) LCD2.7(VD4) LCD4.7 SMART210(TINY210V2).A45
VD5: LCD1.8(VD5) LCD2.8(VD5) LCD4.8 SMART210(TINY210V2).A46
VD6: LCD1.9(VD6) LCD2.9(VD6) LCD4.9 SMART210(TINY210V2).A47
VD7: LCD1.10(VD7) LCD2.10(VD7) LCD4.10 SMART210(TINY210V2).A48
VD8: LCD1.12(VD8) LCD2.12(VD8) LCD4.12 SMART210(TINY210V2).A49
VD9: LCD1.13(VD9) LCD2.13(VD9) LCD4.13 SMART210(TINY210V2).A50
VD10: LCD1.14(VD10) LCD2.14(VD10) LCD4.14 SMART210(TINY210V2).A51
VD11: LCD1.15(VD11) LCD2.15(VD11) LCD4.15 SMART210(TINY210V2).A52
VD12: LCD1.16(VD12) LCD2.16(VD12) LCD4.16 SMART210(TINY210V2).A53
VD13: LCD1.17(VD13) LCD2.17(VD13) LCD4.17 SMART210(TINY210V2).A54
VD14: LCD1.18(VD14) LCD2.18(VD14) LCD4.18 SMART210(TINY210V2).A55
VD15: LCD1.19(VD15) LCD2.19(VD15) LCD4.19 SMART210(TINY210V2).A56
VD16: LCD1.21(VD16) LCD2.21(VD16) LCD4.21 SMART210(TINY210V2).A57
VD17: LCD1.22(VD17) LCD2.22(VD17) LCD4.22 SMART210(TINY210V2).A58
VD18: LCD1.23(VD18) LCD2.23(VD18) LCD4.23 SMART210(TINY210V2).A59
VD19: LCD1.24(VD19) LCD2.24(VD19) LCD4.24 SMART210(TINY210V2).A60
VD20: LCD1.25(VD20) LCD2.25(VD20) LCD4.25 SMART210(TINY210V2).A61
VD21: LCD1.26(VD21) LCD2.26(VD21) LCD4.26 SMART210(TINY210V2).A62
VD22: LCD1.27(VD22) LCD2.27(VD22) LCD4.27 SMART210(TINY210V2).A63
VD23: LCD1.28(VD23) LCD2.28(VD23) LCD4.28 SMART210(TINY210V2).A64
VS: LCD1.34(VSYNC) LCD2.34(VSYNC) LCD4.34 SMART210(TINY210V2).A65
WIFI0_PD_GPIO: CON14.11 R88.1 SMART210(TINY210V2).A6
WIFI0_RESET_GPIO: CON14.12 R84.2 SMART210(TINY210V2).A4
XEINT6_SD0_NWP: R78.2
XEINT10: CON13.4 LCD1.31(EINT10) LCD2.31(EINT10) LCD4.31 SMART210(TINY210V2).A29
XEINT11: CON14.16 R28.2 R33.2 SMART210(TINY210V2).A31
XEINT12/HDMI_CEC: R79.2
XEINT13/HDMI_HPD: R76.2 R77.2 SMART210(TINY210V2).B32
XEINT14: CON13.26 LCD1.43(EINT14) LCD4.43 SMART210(TINY210V2).A30
XEINT15: CON13.25 LCD1.44(EINT15) LCD4.44 SMART210(TINY210V2).A32
XEINT16/KP_COL0: CON14.21 K1.1 R35.1 SMART210(TINY210V2).A21
XEINT17/KP_COL1: CON14.22 K2.1 R37.1 SMART210(TINY210V2).A23
XEINT18/KP_COL2: CON14.23 K3.1 R39.1 SMART210(TINY210V2).A25
XEINT19/KP_COL3: CON14.24 K4.1 R40.1 SMART210(TINY210V2).A27
XEINT24/KP_ROW0: CON14.25 K5.1 R43.2 SMART210(TINY210V2).A22
XEINT25/KP_ROW1: CON14.26 K6.1 R64.2 SMART210(TINY210V2).A24
XEINT26/KP_ROW2: CON14.27 K7.1 R65.2 SMART210(TINY210V2).A26
XEINT27/KP_ROW3: CON14.28 K8.1 R66.2 SMART210(TINY210V2).A28
XHDMITX0N: HDMI1.9(TMDS DATA0-) SMART210(TINY210V2).B27
XHDMITX0P: HDMI1.7(TMDS DATA0+) SMART210(TINY210V2).B25
XHDMITX1N: HDMI1.6(TMDS DATA1-) SMART210(TINY210V2).B26
XHDMITX1P: HDMI1.4(TMDS DATA1+) SMART210(TINY210V2).B24
XHDMITX2N: HDMI1.3(TMDS DATA2-) SMART210(TINY210V2).B31
XHDMITX2P: HDMI1.1(TMDS DATA2+) SMART210(TINY210V2).B29
XHDMITXCN: HDMI1.12(TMDS CLOCK-) SMART210(TINY210V2).B30
XHDMITXCP: HDMI1.10(TMDS CLOCK+) SMART210(TINY210V2).B28
XI2CSCL0: CAMERA.2 CON13.29 CON14.5 R9.2 R31.1 SMART210(TINY210V2).A34 U5.6(SCL) U7.6(SCL)
XI2CSCL1: HDMI1.15(SCL) SMART210(TINY210V2).B34
XI2CSCL2: CON13.30 LCD1.41(SCL1) LCD4.41 SMART210(TINY210V2).A38
XI2CSDA0: CAMERA.1 CON13.27 CON14.6 R10.2 R32.1 SMART210(TINY210V2).A36 U5.5(SDA) U7.7(SDA)
XI2CSDA1: HDMI1.16(SDA) SMART210(TINY210V2).B33
XI2CSDA2: CON13.28 LCD1.42(SDA1) LCD4.42 SMART210(TINY210V2).A40
XMIPIMDN0: CON13.12 SMART210(TINY210V2).B49
XMIPIMDN1: CON13.16 SMART210(TINY210V2).B53
XMIPIMDN2: CON13.20 SMART210(TINY210V2).B57
XMIPIMDN3: CON13.24 SMART210(TINY210V2).B61
XMIPIMDNCLK: CON13.8 SMART210(TINY210V2).B45
XMIPIMDP0: CON13.10 SMART210(TINY210V2).B47
XMIPIMDP1: CON13.14 SMART210(TINY210V2).B51
XMIPIMDP2: CON13.18 SMART210(TINY210V2).B55
XMIPIMDP3: CON13.22 SMART210(TINY210V2).B59
XMIPIMDPCLK: CON13.6 SMART210(TINY210V2).B43
XMMC0CDN: CON10.11(NCD) R71.1 SMART210(TINY210V2).A19
XMMC0DATA0: CON10.7(DAT0) R73.1 SMART210(TINY210V2).A11
XMMC0DATA1: CON10.8(DAT1) R72.1 SMART210(TINY210V2).A13
XMMC0DATA2: CON10.9(DAT2) R74.1 SMART210(TINY210V2).A15
XMMC0DATA3: CON10.1(CD/DAT3) R38.1 SMART210(TINY210V2).A17
XMMC2DATA0: CON14.17 R18.1 SMART210(TINY210V2).A12
XMMC2DATA1: CON14.18 R34.2 SMART210(TINY210V2).A14
XMMC2DATA2: CON14.19 R19.1 SMART210(TINY210V2).A16
XMMC2DATA3: CON14.20 R60.2 SMART210(TINY210V2).A18
XMMCCDN2: CON14.15 R14.1 SMART210(TINY210V2).A20
XMMCCLK0: CON10.5(CLK) R41.1 SMART210(TINY210V2).A9
XMMCCLK2: CON14.13 R13.1 SMART210(TINY210V2).A10
XMMCCMD0: CON10.2(CMD) R42.1 SMART210(TINY210V2).A7
XMMCCMD2: CON14.14 R23.2 SMART210(TINY210V2).A8
XPWMTOUT0: R6.2 SMART210(TINY210V2).A33
XPWMTOUT1: LCD1.30(TOUT1) LCD2.30(TOUT1) LCD4.30 SMART210(TINY210V2).A35
XSPICLK0: CON14.9 SMART210(TINY210V2).B42
XSPICS0: CON14.10 SMART210(TINY210V2).B36
XSPIMISO0: CON14.8 SMART210(TINY210V2).B38
XSPIMOSI0: CON14.7 SMART210(TINY210V2).B40
XUCTSN1: CON2.2 SMART210(TINY210V2).B9
XUHDM: R96.2 SMART210(TINY210V2).A37
XUHDP: R82.2 SMART210(TINY210V2).A39
XUODM: MINIUSB1.2(D-) SMART210(TINY210V2).B37
XUODP: MINIUSB1.3(D+) SMART210(TINY210V2).B39
XUODRVVBUS: SMART210(TINY210V2).B44
XUOID: MINIUSB1.4(ID) SMART210(TINY210V2).B35
XUOVBUS: C51.1 C52.1 MINIUSB1.1(VBUS) SMART210(TINY210V2).B41
XURTSN1: CON2.1 SMART210(TINY210V2).B10
XURXD0: CON1.2 SMART210(TINY210V2).B2 U2.12(ROUT1)
XURXD1: CON2.4 SMART210(TINY210V2).B4
XURXD2: CON3.2 CON14.4 SMART210(TINY210V2).B6
XURXD3: CON4.2 SMART210(TINY210V2).B8 U2.9(ROUT2)
XUTXD0: CON1.1 SMART210(TINY210V2).B1 U2.11(T1IN)
XUTXD1: CON2.3 SMART210(TINY210V2).B3
XUTXD2: CON3.1 CON14.3 SMART210(TINY210V2).B5
XUTXD3: CON4.1 SMART210(TINY210V2).B7 U2.10(T2IN)
N5177401: BUZZER1.2 Q1.C
N5177419: Q1.B R6.1
N5232932: CON10.10(WP) R78.1 R80.1
N5531881: C54.1 U2.4(C2+)
N5532383: C54.2 U2.5(C2-)
N5534824: C55.2 U2.1(C1+)
N5534950: C55.1 U2.3(C1-)
N5537646: C56.2 U2.2(V+)
N5537767: C57.2 U2.6(V-)
N5630781: C27.1 LAN1.8(CHS_GND)
N5631061: C25.1 R24.2 R25.2
N5631095: LAN1.9(LEDG+) R20.2
N5631123: LAN1.12(LEDY+) R21.2
N5631131: C26.1 R26.2 R29.2
N6065143: R52.2 SPK1.2(B)
N6065295: C28.1 R52.1 R54.1 R55.2
N6065641: R48.1 SPK1.5(E)
N6147863: D1.1(ANODE) R2.1
N6148013: CN1.1 CON5.4 S1.3
N6148095: BT1.1(+) R3.2
N9311310: HDMI1.19(HOT PLUG DETECT) R76.1
N9311416: HDMI1.13(CEC) R79.1
N9311448: HDMI1.17(DDC/CEC GROUND) R75.1
N9330855: R5.1 U6.3(EN2) U6.4(EN1)
N9451335: MIC1.1 MIC2.2(B) MIC2.3(C)
N9470172: R33.1 U7.5(I\N\T\)
N9762804: R96.1 R131.1 U11.30(USBUP_DM)
N9762824: R82.1 R130.1 U11.31(USBUP_DP)
N9762844: C95.1 R128.2 U11.33(XTAL1/CLKIN) Y3.2
N9763008: C80.1 C82.1 C86.1 C87.1 C88.1 C89.1 C93.1 C94.1 R118.1 U11.5(VDDA33#5) U11.10(VDDA33#10) U11.15(VDD33(REG)) U11.23(VDD33(IO)) U11.29(VDDA33#29) U11.36(VDDPLLREF/VDDA33)
N9763322: C81.1 R128.1 U11.32(XTAL2/CLKIN_EN) Y3.1
N9763428: C85.1 R119.1 U11.27(VBUS_DET)
N9763606: C84.1 C90.1 U11.34(PLLFILT)
N9763626: C91.1 C92.1 U11.14(CRFILT)
N9764104: R93.2 R95.1 USBH2.2(D-)
N9764132: R94.2 R97.1 USBH2.3(D+)
N9764300: R98.2 R100.1 USBH3.2(D-)
N9764304: R99.2 R101.1 USBH3.3(D+)
N9764500: R109.1 R110.2 USBH4.2(D-)
N9764520: R112.2 R113.1 USBH4.3(D+)
N9765197: R89.2 R91.1 USBH1.2(D-)
N9765225: R90.2 R92.1 USBH1.3(D+)

Pads without a net: BT1 3 4; COM0 1 4 6 7 8 9 10 11; COM3 1 4 6 7 8 9 10 11; CON13 5 7 9 11 13 15 17 19 21 23; HDMI1 14; K1 3; K2 3; K3 3; K4 3; K5 3; K6 3; K7 3; K8 3; K9 3; LAN1 7 M3 M4; LCD1 32; LCD2 32 37 38 39 40; LCD4 32; S1 1 2 5; S2 1 5; U7 2 10 M1 M2; U11 12 13 16 17 18 19 20 21; USBH2 5

## Via types
v1: diameter 0.711, hole 0.356, TOP to BOTTOM, 954 vias

## Routing (per net, layer and track width the routed paths; a pad name or vN(x,y) marks a point on that pad's centre or on a via; arc(x,y) is an arc through that point)
DGND: length 1682.9
  TOP w0.203: v1(17.78,77.09) v1(24.89,77.09) 38.61,77.09 42.7,73 42.7,70 v1(42.04,69.34) ; 128.65,85.85 128.65,83.85 v1(128.45,83.64) 128.65,83.44 v1(128.65,80.65) 128.65,78.49 v1(129.29,77.85) 129.29,75.95 130.43,74.8 v1(130.43,74.68) ; 114.94,118.87 v1(111.51,115.44) 107.57,111.51 v1(107.57,111.25) 104.09,111.25 v1(104.08,111.24) ; v1(97.43,109.75) 97.03,109.34 97.03,98.86 v1(97.12,98.77) 97.03,98.67 97.03,90.8 v1(97.19,90.63) 97.03,90.47 97.03,90.17 103.5,83.69 v1(103.5,83.57) 103.63,83.57 106.55,80.65 v1(106.55,80.65) 106.55,80.64 109.35,77.85 v1(109.47,77.85) 109.47,77.72 v1(112.52,74.68) 117.83,69.37 v1(117.86,69.37) ; 144.42,92.99 145.41,92.99 145.49,93.07 ; 125.86,42.29 125.98,42.42 125.98,43.43 ; v1(100.46,107.31) 100.46,95.38 v1(100.58,95.25) 100.46,95.12 100.46,90.98 v1(108.04,83.4) ; 123.83,43.43 123.83,42.42 123.95,42.29 ; 12.24,73.51 13.51,73.51 ; 130.43,44.07 131.57,44.07 ; 131.95,43.56 131.95,42.55 ; 129.92,43.43 129.92,42.29 ; 128.02,43.43 128.02,42.29 ; v1(35.69,70.74) 34.92,71.5 v1(26.67,71.5) ; 149.91,92.56 149.91,91.41 ; 11.28,55.42 10.06,55.42
  TOP w0.254: v1(65.53,81.03) 66.84,82.33 U7.1 ; v1(152.86,109.88) 153.62,109.88 153.77,109.73 U11.11 ; U7.8 67.84,84.88 v1(67.86,84.87) 68.34,84.38 U7.4 v1(68.34,80.77)
  TOP w0.305: 125.73,44.07 125.6,43.94 124.59,43.94 ; 138.46,93.07 139.45,93.07 ; 97.69,125.48 97.64,125.43 97.64,124.43 97.69,124.38 ; 175.87,44.35 175.87,45.57 175.82,45.62 ; 23.32,126.36 23.32,127.46 ; 131.95,44.58 131.95,45.59 ; 109.98,42.29 109.86,42.42 109.86,43.43 ; v1(26.67,68.24) 33.36,68.24 34.41,67.19 34.41,66.43 33.94,65.96 v1(33.94,62.1) ; 167.94,92.53 167.94,91.39 ; 117.86,93.52 117.86,94.46 ; 163.93,93.55 163.93,94.49 ; 93.65,125.37 93.65,124.28 93.7,124.23 ; 117.86,43.81 118.65,43.02 SMART210(TINY210V2).B60 118.92,43.1 119.63,43.81 ; 145.92,44.58 145.92,45.59 ; 155.91,93.52 155.91,94.44 ; HDMI1.5 146.9,10.43 146.62,10.15 146.54,10.15 146.05,9.66 v1(145.4,9.66) HDMI1.8 ; 98.25,125.91 99.24,125.91 ; 142.54,92.99 143.54,92.99 ; 165.94,92.58 165.94,91.44 ; 9.75,91.49 v1(11.56,91.49) ; 126.49,44.07 127.38,44.07 ; v1(44.83,70.87) v1(44.83,75.18) ; 90.04,125.91 91.03,125.91 ; 127.89,44.58 127.89,45.59 ; 161.95,93.57 161.95,94.51 ; 128.4,44.07 129.54,44.07 ; 111.86,93.55 111.86,94.46 ; 152.02,91.44 151.94,91.52 151.94,92.51 152.02,92.58 ; 111.38,44.07 111.25,43.94 110.49,43.94 ; 139.93,94.61 139.93,93.47 ; 109.35,44.07 108.08,44.07 ; 158.45,93.01 159.44,93.01 ; 159.92,93.52 159.92,94.46 ; 171.93,92.46 171.93,91.57 ; 154.56,93.01 155.55,93.01 ; 113.28,44.07 112.39,44.07 ; 163.91,92.56 163.91,91.41 ; 160.53,93.07 161.52,93.07 ; 143.94,94.49 143.94,93.34 ; 149.86,44.58 149.86,45.47 149.99,45.59 ; 112.47,93.04 113.46,93.04 ; 109.86,44.58 109.86,45.47 109.98,45.59 ; 171.88,43.54 171.88,42.39 ; 140.51,93.07 141.5,93.07 ; 113.84,93.52 113.84,94.44 ; 123.83,43.94 123.7,44.07 122.43,44.07 ; 157.99,93.68 157.99,94.61 ; 111.89,43.43 111.89,42.55 ; 123.95,93.73 123.95,94.67 ; 9.75,95.49 11.56,95.49 ; 113.92,44.58 113.92,45.72 ; 13.82,91.49 11.94,91.49 ; 157.96,92.68 157.96,91.54 ; 125.88,93.57 125.88,94.51 ; 150.34,93.01 151.33,93.01 ; 118.49,44.07 119.51,44.07 ; 104.06,125.91 105.05,125.91 ; 145.92,43.43 145.92,42.42 ; 111.89,44.58 111.89,45.72 ; 121.95,92.56 121.95,91.41 ; 89.74,125.45 89.66,125.37 89.66,124.38 ; 120.42,92.94 121.41,92.94 ; 121.87,93.57 121.87,94.49 ; 120.93,125.98 122.2,125.98 ; 96.16,125.88 97.16,125.88 ; 153.92,93.55 153.92,94.46 ; 141.96,92.58 141.96,91.44 ; 119.89,93.6 119.89,94.51 ; 155.98,92.51 155.98,91.36 ; 173.86,42.37 173.86,43.51 ; 156.49,93.04 157.48,93.04 ; 118.59,93.07 119.58,93.07 ; 13.82,89.49 11.94,89.49 ; 151.94,93.6 151.94,94.51 ; 165.96,93.57 165.96,94.51 ; 94.21,125.91 95.2,125.91 ; 167.97,93.52 167.97,94.46 ; 147.9,43.54 147.9,42.32 ; 109.3,125.81 109.17,125.93 108.1,125.93 108.03,125.86 ; 154,92.53 154,91.39 ; 110.36,93.01 111.35,93.01 ; 11.94,95.49 13.82,95.49 ; 114.5,93.01 115.49,93.01 ; 109.63,125.43 109.63,124.31 ; 164.44,92.99 165.43,92.99 ; 102.11,125.93 103.1,125.93 ; 126.57,92.99 127.56,92.99 ; 113.92,43.43 113.92,42.29 ; 147.96,44.58 147.96,45.54 ; 161.93,92.58 161.93,91.44 ; 171.88,44.68 171.88,45.82 ; 92.28,125.88 93.27,125.88 ; 9.75,93.49 v1(11.56,93.49) ; 9.75,89.49 v1(11.56,89.49) ; 116.56,92.99 117.55,92.99 ; 119.89,44.58 119.89,45.59 ; 162.46,93.04 163.45,93.04 ; 166.42,93.04 167.41,93.04 ; 125.86,92.58 125.86,91.44 ; 113.97,92.48 113.97,91.34 ; 169.85,92.51 169.85,91.41 ; 117.88,92.51 117.88,91.36 ; 13.82,93.49 11.94,93.49 ; 139.93,92.56 139.93,91.41 ; 122.61,93.07 123.6,93.07 ; HDMI1.2 v1(148.4,9.66) ; 101.57,125.53 101.57,124.33 ; 111.99,92.51 111.99,91.36 ; 23.27,125.58 23.27,124.26 ; 115.93,93.68 115.93,94.61 ; 143.92,92.53 143.92,91.39 ; 159.89,92.53 159.89,91.39 ; 152.32,93.04 153.31,93.04 ; 173.89,44.5 173.89,45.64 ; 123.93,92.74 123.93,91.59 ; HDMI1.11 v1(143.9,9.66) ; 123.95,44.58 123.95,45.72 ; 168.5,92.99 169.49,92.99 ; 141.91,94.49 141.91,93.34 ; 119.96,92.58 119.96,91.44 ; 106.07,125.88 107.06,125.88 ; 115.95,92.66 115.95,91.52 ; 170.41,93.04 171.4,93.04 ; 105.64,125.4 105.64,124.41 ; 124.41,93.07 125.4,93.07 ; 100.2,125.88 101.19,125.88
  TOP w0.381: C81.2 152.15,98.17 R130.2 ; 110.92,95.83 111.89,96.8 111.89,99.82 118.87,106.81 v1(120.14,106.81) ; C90.2 158.12,98.17 157.31,98.97 157.31,98.97 C95.2 ; 121.92,43.56 121.92,42.29
  TOP w0.559: 13.78,18.29 CON5.3 14.99,19.49 ; 64.01,18.84 CON3.4 ; CON3.4 65.28,17.06 ; CON3.4 65.28,20.62 ; 10.17,10.66 CN1.2 ; CN1.2 10.17,13.54 ; CN1.2 11.5,12.1 ; CN1.2 8.83,12.1 ; v1(108.97,17.65) 108.2,18.41 C28.2 ; R117.1 v1(143.89,108.71) ; v1(118.24,2.16) 118.24,19.56 117.47,20.32 117.47,21.34 118.87,22.73 v1(118.87,24.51) 118.87,25.15 117.6,26.42 R47.2 v1(117.6,27.81) 117.47,27.94 117.47,32.64 120.52,35.69 120.52,41.42 SMART210(TINY210V2).B60 117.98,42.09 117.98,37.97 114.81,34.8 v1(114.81,27.81) 114.81,23.62 112.65,21.46 112.65,21.15 v1(112.62,21.13) v1(112.62,15.24) 112.62,13.69 v1(112.14,13.21) ; C10.1 v1(137.67,120.5) ; C90.2 v1(158.12,97.05) ; C9.1 v1(136.14,120.5) ; C52.2 v1(127.64,20.45) ; C52.2 128.54,19.43 ; C52.2 127.64,18.53 ; C94.2 158.75,110.87 v1(158.57,111.05) 157.48,112.14 C74.2 ; SMART210(TINY210V2).A69 176.86,92.02 175.84,93.04 ; SMART210(TINY210V2).A69 176.92,90.97 ; SMART210(TINY210V2).A69 177.97,92.02 ; R113.2 v1(161.65,108.74) ; 3.83,47.28 K7.2 ; K7.2 3.83,49.44 ; K7.2 2.75,48.36 ; 39.52,9.14 COM3.5 ; COM3.5 40.79,10.41 ; COM3.5 38.25,10.41 ; COM3.5 39.52,11.68 ; R91.2 v1(92.33,19.94) ; C87.2 v1(144.91,114.55) ; R92.2 v1(94.49,19.94) ; COM0.5 74.57,10.54 ; COM0.5 73.3,11.81 ; COM0.5 73.3,9.27 ; COM0.5 72.03,10.54 ; R4.2 175.9,27.1 ; R4.2 175.01,26.19 ; R4.2 176.78,26.19 ; R77.1 v1(137.79,15.58) ; C30.2 65.79,89.66 v1(65.28,90.17) ; H8.1 3.58,111 1.45,108.86 ; 40.93,36.12 C56.1 ; C56.1 42.74,36.12 ; C56.1 41.83,37.02 ; C85.2 v1(143.89,102.62) ; C25.2 v1(162.05,31.62) ; K3.2 4.91,79.86 ; K3.2 3.83,80.94 ; K3.2 3.83,78.78 ; K3.2 2.75,79.86 ; C84.2 v1(159.64,97.05) ; 20.51,24.33 C2.2 21.59,23.25 ; 30.21,31.37 C3.2 29.13,32.45 ; BT1.2 78.38,47.41 ; BT1.2 76.7,44.93 ; BT1.2 80.07,44.93 ; BT1.2 78.38,42.46 ; 18.31,128.01 CON14.2 17.23,126.93 ; MINIUSB1.7 124.51,8.95 ; MINIUSB1.7 123.31,10.44 ; MINIUSB1.7 122.12,8.95 ; MINIUSB1.7 123.31,7.45 ; CON1.4 39.5,20.59 ; CON1.4 38.23,18.81 ; CON1.4 39.5,17.04 ; R116.1 v1(143.89,107.19) ; 3.83,86.65 K2.2 ; K2.2 2.75,87.73 ; K2.2 3.83,88.81 ; 160.27,102.23 159.77,101.73 C80.2 ; 160.27,102.23 161.16,101.35 C97.2 161.24,101.27 v1(162.43,100.08) ; 160.27,102.23 v1(160.27,102.49) ; 139.92,115.95 C5.2 138.84,117.03 ; R115.1 v1(143.89,105.66) ; C83.2 v1(143.89,104.14) ; 17.91,89.66 v1(17.91,88.27) ; 1.5,108.13 3.63,106 H7.1 ; C86.2 v1(160.27,103.63) 160.78,103.12 R109.2 ; HDMI1.23 151.65,6.76 ; HDMI1.23 152.98,4.92 ; HDMI1.23 151.65,3.08 ; HDMI1.23 150.32,4.92 ; C1.2 12.67,26.42 ; C1.2 9.24,26.42 ; C1.2 10.95,24.45 ; C1.2 10.95,28.39 ; K8.2 3.83,41.57 ; K8.2 3.83,39.41 ; K8.2 2.75,40.49 ; K8.2 4.91,40.49 ; 97.64,10.11 USBH1.6 ; USBH1.6 102.34,10.11 ; USBH1.6 99.99,12.46 ; USBH1.6 99.99,7.76 ; v1(131.32,113.92) 131.32,114.05 131.83,114.55 U6.2 ; v1(39.12,70.74) 39.17,70.79 39.17,71.61 39.22,71.66 39.22,72.42 37.47,74.17 v1(26.67,74.17) ; R121.2 v1(161.29,97.03) ; C4.2 29.35,33.66 ; C4.2 28.45,34.56 ; C4.2 28.45,32.75 ; 50.04,118.8 CON10.12 ; CON10.12 48.48,120.36 ; CON10.12 50.04,121.93 ; CON10.12 49.02,121.41 v1(49.02,122.17) ; CON10.12 51.6,120.36 ; R111.1 v1(141.07,99.8) ; C29.2 v1(65.66,78.99) ; C29.2 66.8,78.09 ; C29.2 67.7,78.99 ; v1(25.27,80.14) 41.15,80.14 43.12,78.17 43.96,78.17 44.36,77.77 44.4,77.77 v1(44.7,77.47) ; U5.1 26.54,111.38 ; U5.1 v1(23.37,111.38) ; U5.1 25.15,110.63 ; K4.2 4.91,71.99 ; K4.2 2.75,71.99 ; K4.2 3.83,73.06 ; K4.2 3.83,70.91 ; MINIUSB1.9 132.21,4.79 ; MINIUSB1.9 132.21,1.8 ; MINIUSB1.9 131.02,3.3 ; MINIUSB1.9 133.41,3.3 ; 139.19,116.13 137.97,116.13 C6.2 137.29,115.82 v1(136.65,116.46) ; 167.3,112.04 USBH4.6 ; USBH4.6 169.65,114.39 ; USBH4.6 172,112.04 ; USBH4.6 169.65,109.69 ; 46.31,128.01 CON14.30 47.39,126.93 ; 69.75,99.37 CON10.6 ; CON10.6 71.58,99.37 ; CON10.6 70.67,100.71 ; K1.2 3.83,96.69 ; K1.2 3.83,94.53 ; K1.2 2.75,95.61 ; C7.1 C8.1 134.24,120.47 v1(134.21,120.5) ; 84.48,10.11 USBH1.5 ; USBH1.5 89.18,10.11 ; USBH1.5 86.83,7.76 ; USBH1.5 86.83,12.46 ; HDMI1.22 138.48,4.92 ; HDMI1.22 137.15,3.08 ; HDMI1.22 137.15,6.76 ; HDMI1.22 135.82,4.92 ; 168.15,25.78 v1(168.15,26.92) ; C26.2 v1(163.96,31.62) ; 169.35,119.67 USBH3.5 ; USBH3.5 171.7,122.02 ; USBH3.5 171.7,117.32 ; C96.2 v1(173.86,112.78) ; 79.25,120.02 CON10.13 ; CON10.13 79.25,123.14 ; CON10.13 77.68,121.58 ; CON10.13 80.81,121.58 ; 49.15,18.81 CON2.6 ; CON2.6 50.42,20.59 ; CON2.6 50.42,17.04 ; C81.2 153.54,99.72 152.77,100.5 152.62,100.5 152.42,100.69 v1(152.37,100.69) ; U5.4 24.18,115.19 23.52,114.53 v1(23.52,114.4) 24,113.92 U5.3 ; 40.93,23.93 C57.1 41.83,23.03 ; MINIUSB1.5 130.06,9.35 ; MINIUSB1.5 v1(129.36,11.25) ; MINIUSB1.5 129.36,7.85 ; 165.67,108.97 USBH4.4 ; USBH4.4 166.94,110.24 ; USBH4.4 168.21,108.97 ; C91.2 149.48,113.45 v1(148.72,114.21) 147.96,113.45 C92.2 ; 130.15,120.4 129.92,120.17 C114.1 129.16,119.25 v1(128.91,119.51) ; 7.33,9.1 CN1.3 ; CN1.3 10,9.1 ; CN1.3 8.67,7.66 ; CN1.3 8.67,10.54 ; 150.32,10.92 HDMI1.21 ; HDMI1.21 151.65,8.32 ; HDMI1.21 151.65,13.52 ; 122.12,3.3 MINIUSB1.8 ; MINIUSB1.8 124.51,3.3 ; MINIUSB1.8 123.31,1.8 ; MINIUSB1.8 123.31,4.79 ; C93.2 v1(146.43,114.55) ; 3.83,63.03 K5.2 ; K5.2 3.83,65.19 ; K5.2 2.75,64.11 ; K5.2 4.91,64.11 ; R101.2 159.26,111.61 159.84,111.02 v1(159.84,110.9) ; USBH1.4 96.92,14.1 ; USBH1.4 98.19,12.83 ; USBH1.4 96.92,11.56 ; R75.2 v1(140.84,19.43) ; 120.54,19.43 C51.2 ; C51.2 121.62,20.51 ; C51.2 121.62,18.35 ; v1(132.97,17.65) C59.1 v1(132.97,20.52) C60.1 v1(132.97,23.24) ; 111.73,125.65 112.46,124.93 CON13.2 112.63,124.69 v1(111.51,123.57) ; C22.2 v1(155.07,28.07) ; C58.1 54.29,32.69 ; C58.1 53.39,31.79 ; C58.1 U2.15 ; 138.35,126.14 137.56,126.93 CAMERA.20 ; 141.25,121.91 USBH2.6 141.25,117.21 ; LCD4.40 9.21,92.49 ; R131.2 146.08,98.02 C88.2 146.05,97.28 145.54,96.77 v1(144.4,96.77) ; U5.2 v1(23.37,112.65) ; K6.2 4.91,56.24 ; K6.2 3.83,55.16 ; K6.2 2.75,56.24 ; K6.2 3.83,57.32 ; 132.21,7.45 MINIUSB1.6 ; MINIUSB1.6 132.21,10.44 ; MINIUSB1.6 131.02,8.95 ; MINIUSB1.6 133.41,8.95 ; R48.2 v1(111.25,21.34) ; 64.01,98.04 CON10.3 64.01,100.71 ; 135.82,10.92 HDMI1.20 137.15,8.32 ; C23.2 v1(156.84,27.3) ; v1(152.02,110.71) 152.02,110.72 151.65,111.09 R97.2 ; R95.2 156.36,110.95 v1(156.48,110.95) ; R100.2 v1(163.83,110.69) ; 33.85,20.49 D1.2 ; D1.2 v1(34.93,18.8) ; D1.2 36,20.49 ; v1(29.84,25.91) U1.1 v1(31.5,27.81) ; LCD4.37 13.67,90.49 ; 176.13,31.08 K9.2 177.21,32.15 ; U5.7 18.67,112.65 v1(18.03,113.28) ; v1(108.94,95.89) 108.92,95.86 SMART210(TINY210V2).A2 108.93,94.02 109.7,93.24 ; v1(90.04,21.34) C73.2 90.47,19.48 v1(91.44,20.45) ; v1(116.66,41.78) 116.66,39.83 111.38,34.54 v1(111.38,27.3) 111.38,24.89 v1(110.74,24.26) v1(108.08,21.59) 107.57,21.08 107.19,20.7 107.19,17.91 109.73,15.37 109.73,12.83 v1(107.82,10.92) ; 76.08,17.09 CON4.4 ; CON4.4 76.08,20.64 ; CON4.4 74.81,18.86 ; USBH4.5 169.65,101.23 ; USBH4.5 167.3,98.88 ; USBH4.5 172,98.88 ; C24.2 v1(158.37,27.3) ; C89.2 159.26,106.05 v1(159.89,106.68) ; 133.86,43.81 133.06,43.02 SMART210(TINY210V2).B46 ; 9.65,73.08 10.23,72.49 LCD4.20 10.8,72.49 11.73,73.43 ; LCD4.39 14.06,92.49 ; LCD4.38 9.62,90.49 ; C82.2 v1(143.89,101.09)
  BOTTOM w0.203: v1(114.57,80.67) 114.55,80.67 114.54,80.65 110.78,80.65 v1(110.76,80.67) ; v1(28.49,111.67) 28.91,111.67 29.64,112.39 v1(36.32,112.39) v1(49.91,112.39) v1(53.98,112.39) v1(58.29,112.39) v1(63.75,112.39) v1(68.96,112.39) v1(73.15,112.39) v1(78.36,112.39) v1(82.68,112.39) 86.25,112.39 v1(86.26,112.38) 86.27,112.39 88.05,112.39 v1(88.05,112.39) 88.06,112.39 89.78,112.39 ; 89.78,112.39 89.78,112.4 v1(89.85,112.4) ; 89.78,112.39 91.66,112.39 v1(91.67,112.38) ; 109.91,43.43 109.91,42.44 ; 143.87,92.48 143.87,91.52 ; 109.93,48.31 109.93,49.4 109.86,49.48 ; 111.35,43.99 110.44,43.99 ; 141.86,92.43 141.86,91.44 ; v1(88.06,83.79) 88.42,83.79 89.57,82.64 89.57,82.35 v1(90.52,81.4)
  BOTTOM w0.254: LCD2.11 35.47,85.5 v1(35.81,85.85) ; v1(44.7,77.47) 44.47,77.71 LCD2.29 ; LCD1.45 v1(50.95,62.23) ; LCD2.20 39.97,84.04 v1(40.64,84.71) ; 112.11,128.84 109.39,128.84
  BOTTOM w0.305: 43.33,125.4 43.33,124.33 ; 39.78,125.96 40.79,125.96 ; v1(39.12,70.74) 39.12,68.58 38.44,67.91 LCD1.20 v1(38.44,62.1) ; 105.69,126.39 105.64,126.44 105.64,127.41 105.69,127.46 ; 125.91,93.4 125.91,94.49 ; 164.01,44.48 163.96,44.53 163.96,45.52 164.01,45.57 ; 156.39,44.02 157.43,44.02 ; 35.79,125.93 36.8,125.93 ; 115.92,45.92 115.92,44.25 ; 127.92,43.82 127.92,42.08 ; 155.88,43.51 155.88,42.52 ; 23.77,125.88 24.79,125.88 ; 111.92,43.82 111.92,42.08 ; 83.69,124.31 83.69,124.31 83.69,125.55 83.69,125.55 ; 112.47,44.02 113.49,44.02 ; 35.31,125.45 35.31,124.38 ; 39.29,125.48 39.29,124.41 ; 126.21,93.01 127.48,93.01 ; LCD1.40 48.45,62.42 v1(48.13,62.1) 47.95,62.29 LCD1.39 v1(47.95,65.85) ; 138.2,92.96 139.47,92.96 ; 101.69,127.51 101.69,127.5 101.69,126.47 101.69,126.47 ; 11.71,69 11.71,67.88 ; 123.92,43.82 123.92,42.08 ; 33.3,126.47 33.3,127.64 ; 127.92,45.92 127.92,44.25 ; 23.32,126.39 23.32,127.56 ; 99.69,125.55 99.69,125.55 99.69,124.31 99.69,124.31 ; 31.32,125.43 31.32,124.36 ; 12.01,83.49 13.89,83.49 ; 86.18,125.98 87.29,125.98 ; 120.47,44.02 121.49,44.02 ; 96.18,125.98 97.29,125.98 ; 12.01,75.49 13.89,75.49 ; 11.71,81 11.71,79.88 ; 133.92,43.82 133.92,42.08 ; 87.69,125.55 87.69,125.55 87.69,124.31 87.69,124.31 ; 102.18,125.98 103.29,125.98 ; 132.16,93.01 133.43,93.01 ; 161.95,44.45 161.95,45.54 ; 144.42,44.07 145.41,44.07 ; 12.01,65.49 13.89,65.49 ; 25.3,126.47 25.3,127.64 ; 85.69,124.31 85.69,124.31 85.69,125.55 85.69,125.55 ; 91.69,127.51 91.69,127.5 91.69,126.47 91.69,126.47 ; 33.76,125.96 34.77,125.96 ; 12.01,69.49 13.89,69.49 ; 11.71,59 11.71,57.88 ; 11.71,77 11.71,75.88 ; 88.18,125.98 89.29,125.98 ; 11.71,87 11.71,85.88 ; 99.69,127.51 99.69,127.5 99.69,126.47 99.69,126.47 ; 122.12,92.99 123.39,92.99 ; 11.71,73 11.71,71.88 ; 12.01,57.49 13.89,57.49 ; 116.36,92.99 117.53,92.99 ; 95.69,126.47 95.69,126.47 95.69,127.5 95.69,127.51 ; 9.65,73.49 11.53,73.49 ; 95.69,125.55 95.69,125.55 95.69,124.31 95.69,124.31 ; 83.69,126.47 83.69,126.47 83.69,127.5 83.69,127.51 ; 159.92,43.51 159.92,42.47 ; 98.18,125.98 99.29,125.98 ; 29.34,126.47 29.34,127.64 ; 123.92,45.92 123.92,44.25 ; 87.69,126.47 87.69,126.47 87.69,127.5 87.69,127.51 ; 129.95,91.34 129.95,92.43 ; 9.65,57.49 11.53,57.49 ; 29.31,125.48 29.31,124.41 ; 153.95,43.48 153.95,42.42 ; 11.71,89 11.71,87.88 ; 125.92,45.92 125.92,44.25 ; 19.76,125.93 20.83,125.93 ; v1(44.83,70.87) 44.83,68.33 42.94,66.44 LCD1.29 v1(42.94,62.1) ; 9.65,71.49 11.53,71.49 ; 107.57,125.43 107.57,124.16 ; 93.69,125.55 93.69,125.55 93.69,124.31 93.69,124.31 ; 134.47,44.02 135.49,44.02 ; 9.65,79.49 11.53,79.49 ; 9.65,83.49 11.53,83.49 ; 9.65,77.49 11.53,77.49 ; LCD1.38 47.45,62.6 v1(46.95,62.1) LCD1.37 ; 89.69,126.47 89.69,126.47 89.69,127.5 89.69,127.51 ; 97.69,126.47 97.69,126.47 97.69,127.5 97.69,127.51 ; 9.65,63.49 11.53,63.49 ; 111.61,125.43 111.61,124.13 ; 117.96,93.65 117.96,94.56 ; 134.11,93.01 135.38,93.01 ; 101.69,124.31 101.69,124.31 101.69,125.55 101.69,125.55 ; 12.01,63.49 13.89,63.49 ; 31.8,125.91 32.82,125.91 ; 12.01,85.49 13.89,85.49 ; 91.69,124.31 91.69,124.31 91.69,125.55 91.69,125.55 ; 145.92,44.58 145.92,45.44 145.8,45.57 ; 11.71,67 11.71,65.88 ; 11.71,85 11.71,83.88 ; 37.82,125.93 38.84,125.93 ; 89.69,125.55 89.69,125.55 89.69,124.31 89.69,124.31 ; 136.17,93.04 137.44,93.04 ; 117.92,45.92 117.92,44.25 ; 127.94,91.31 127.94,92.41 ; 107.65,126.49 107.65,127.51 ; 21.31,125.45 21.31,124.38 ; 41.3,125.45 41.3,124.38 ; 105.26,126.01 105.21,125.96 104.17,125.96 104.11,126.01 ; 131.92,45.92 131.92,44.25 ; 116,93.57 116,94.54 ; 103.58,126.44 103.58,127.56 ; 120.12,93.04 121.39,93.04 ; 159.41,43.94 159.26,44.09 158.34,44.09 ; 12.01,59.49 13.89,59.49 ; 129.92,45.92 129.92,44.25 ; 141.86,44.5 141.86,45.59 ; 39.32,126.47 39.32,127.64 ; 161.93,43.43 161.93,42.39 ; 128.12,93.01 129.39,93.01 ; 29.79,125.96 30.81,125.96 ; LCD1.11 v1(33.94,62.1) ; 12.01,67.49 13.89,67.49 ; 25.27,125.48 25.27,124.41 ; 41.33,126.44 41.33,127.61 ; 11.71,79 11.71,77.88 ; 123.95,93.42 123.95,94.51 ; 11.71,83 11.71,81.88 ; 11.71,61 11.71,59.88 ; 9.65,59.49 11.53,59.49 ; 97.69,125.55 97.69,125.55 97.69,124.31 97.69,124.31 ; 132.47,44.02 133.49,44.02 ; 131.9,91.34 131.9,92.43 ; 11.71,75 11.71,73.88 ; 113.92,45.92 113.92,44.25 ; 25.76,125.96 26.77,125.96 ; v1(120.57,126.26) 120.57,127.56 ; 85.69,127.51 85.68,127.5 85.68,126.48 85.69,126.47 ; 9.65,85.49 11.53,85.49 ; 43.81,125.88 44.83,125.88 ; 31.34,126.42 31.34,127.58 ; 33.27,125.48 33.27,124.41 ; 103.63,125.48 103.63,124.43 ; 110.34,93.04 111.38,93.04 ; 12.01,79.49 13.89,79.49 ; 163.98,43.46 163.98,42.42 ; 124.47,44.02 125.49,44.02 ; 114.47,44.02 115.49,44.02 ; 93.69,127.51 93.69,127.5 93.69,126.47 93.69,126.47 ; 12.01,73.49 13.89,73.49 ; 119.96,93.47 119.96,94.56 ; 23.29,125.4 23.29,124.33 ; 35.33,126.44 35.33,127.61 ; 116.47,44.02 117.49,44.02 ; 94.18,125.98 95.29,125.98 ; 9.65,75.49 11.53,75.49 ; 37.36,126.44 37.36,127.61 ; 111.92,45.92 111.92,44.25 ; 153.9,44.53 153.9,45.59 ; 154.43,43.99 155.45,43.99 ; 157.94,44.53 157.94,45.62 ; 37.34,125.45 37.34,124.38 ; 115.92,43.82 115.92,42.08 ; 90.18,125.98 91.29,125.98 ; 130.47,44.02 131.49,44.02 ; 113.92,93.55 113.92,94.59 ; 9.65,65.49 11.53,65.49 ; 140.16,92.99 141.43,92.99 ; 136.47,44.02 137.49,44.02 ; 21.79,125.93 22.81,125.93 ; 12.01,77.49 13.89,77.49 ; 84.18,125.98 85.29,125.98 ; 21.34,126.44 21.34,127.61 ; 9.65,69.49 11.53,69.49 ; 135.92,43.82 135.92,42.08 ; 117.92,43.82 117.92,42.08 ; 118.39,93.09 119.66,93.09 ; 100.18,125.98 101.29,125.98 ; 12.01,87.49 13.89,87.49 ; 155.85,44.58 155.85,45.64 ; 11.71,71 11.71,69.88 ; 27.3,125.45 27.3,124.38 ; 160.32,44.02 161.39,44.02 ; 27.33,126.44 27.33,127.61 ; 105.64,125.45 105.64,124.31 ; 113.92,43.82 113.92,42.08 ; 128.47,44.02 129.49,44.02 ; 124.13,92.96 125.4,92.96 ; 9.65,61.49 11.53,61.49 ; 119.92,45.92 119.92,44.25 ; 122.47,44.02 123.49,44.02 ; 9.65,87.49 11.53,87.49 ; 12.01,81.49 13.89,81.49 ; 92.18,125.98 93.29,125.98 ; 12.01,71.49 13.89,71.49 ; 121.92,45.92 121.92,44.25 ; 135.92,45.92 135.92,44.25 ; 142.19,93.01 143.46,93.01 ; 143.94,44.58 143.94,45.49 ; 141.88,43.54 141.88,42.39 ; 119.92,43.82 119.92,42.08 ; 157.91,43.51 157.91,42.47 ; 131.92,43.82 131.92,42.08 ; 121.92,93.4 121.92,94.49 ; 11.71,63 11.71,61.88 ; 159.94,44.53 159.94,45.62 ; 11.71,65 11.71,63.88 ; 130.12,93.01 131.39,93.01 ; 9.65,67.49 11.53,67.49 ; 126.47,44.02 127.49,44.02 ; 41.78,125.93 42.8,125.93 ; 12.01,61.49 13.89,61.49 ; 112.47,92.99 113.41,92.99 ; 9.65,81.49 11.53,81.49 ; 162.41,43.99 163.5,43.99 ; 27.79,125.93 28.8,125.93 ; 133.93,91.34 133.93,92.43 ; 135.89,91.39 135.89,92.48 ; 109.63,125.53 109.63,124 ; 127.91,93.37 127.91,94.46 ; 142.42,44.07 143.41,44.07 ; 133.92,45.92 133.92,44.25 ; 43.36,126.39 43.36,127.56 ; 118.47,44.02 119.49,44.02 ; 114.43,93.09 115.44,93.09
  BOTTOM w0.381: 142.37,109.09 134.11,109.09 131.83,106.81 v1(120.14,106.81)
  BOTTOM w0.559: HDMI1.20 138.48,10.92 ; HDMI1.20 135.82,10.92 ; HDMI1.20 137.15,13.52 ; HDMI1.20 137.15,8.32 ; v1(78.93,87.57) v1(75.95,87.57) v1(71.75,87.57) v1(62.99,87.57) v1(59.44,87.57) v1(54.99,87.57) v1(51.44,87.57) v1(48.01,87.57) ; CN1.2 11.5,12.1 ; CN1.2 10.17,10.66 ; CN1.2 10.17,13.54 ; CN1.2 8.83,12.1 ; USBH1.4 96.92,14.1 ; USBH1.4 96.92,11.56 ; USBH1.4 98.19,12.83 ; K8.2 3.83,41.57 ; K8.2 2.75,40.49 ; K8.2 3.83,39.41 ; CON14.30 47.39,126.93 ; CON14.30 46.31,126.83 45.52,126.03 ; CON14.30 46.31,128.01 ; 167.3,98.88 USBH4.5 ; USBH4.5 172,98.88 ; USBH4.5 169.65,96.53 ; USBH4.5 169.65,101.23 ; 176.13,31.08 K9.2 ; K9.2 175.05,32.15 ; K9.2 177.21,32.15 ; K9.2 176.13,33.23 ; CON5.3 14.99,19.49 ; CON5.3 13.78,18.29 ; CON5.3 16.19,18.29 ; CON5.3 14.99,17.08 ; HDMI1.22 138.48,4.92 ; HDMI1.22 137.15,6.76 ; HDMI1.22 135.82,4.92 ; HDMI1.22 137.15,3.08 ; USBH1.6 102.34,10.11 ; USBH1.6 97.64,10.11 ; USBH1.6 99.99,12.46 ; USBH1.6 99.99,7.76 ; 65.28,17.06 CON3.4 ; CON3.4 64.01,18.84 ; CON3.4 65.28,20.62 ; CN1.3 10,9.1 ; CN1.3 8.67,10.54 ; CN1.3 7.33,9.1 ; CN1.3 8.67,7.66 ; USBH3.5 171.7,122.02 ; USBH3.5 174.05,119.67 ; USBH3.5 171.7,117.32 ; USBH3.5 169.35,119.67 ; 138.9,119.56 USBH2.6 ; USBH2.6 143.6,119.56 ; USBH2.6 141.25,117.21 ; USBH2.6 141.25,121.91 ; CON2.6 50.42,20.59 ; CON2.6 49.15,18.81 ; CON2.6 50.42,17.04 ; CON14.2 18.31,128.01 ; CON14.2 18.51,126.93 19.33,126.11 ; CON14.2 17.23,126.93 ; v1(54.23,105.66) v1(60.83,105.66) v1(66.8,105.66) v1(72.26,105.66) v1(78.23,105.66) v1(82.93,105.66) 86.24,105.66 v1(86.25,105.65) 86.26,105.66 88.04,105.66 v1(88.05,105.67) ; USBH3.6 158.55,122.02 ; USBH3.6 160.9,119.67 ; USBH3.6 158.55,117.32 ; 14.04,90.49 LCD4.37 LCD4.38 9.48,90.49 ; 72.03,10.54 COM0.5 ; COM0.5 73.3,9.27 ; COM0.5 74.57,10.54 ; COM0.5 73.3,11.81 ; H7.1 3.6,106 1.4,108.2 ; 2.75,71.99 K4.2 ; K4.2 3.83,70.91 ; K4.2 3.83,73.06 ; K4.2 4.91,71.99 ; CAMERA.20 137.77,127 138.81,125.96 ; 39.52,9.14 COM3.5 ; COM3.5 39.52,11.68 ; COM3.5 38.25,10.41 ; COM3.5 40.79,10.41 ; LCD4.29 13.65,82.49 14.12,82.02 ; USBH1.5 86.83,12.46 ; USBH1.5 86.83,7.76 ; USBH1.5 84.48,10.11 ; USBH1.5 89.18,10.11 ; USBH4.6 169.65,114.39 ; USBH4.6 169.65,109.69 ; USBH4.6 167.3,112.04 ; USBH4.6 172,112.04 ; v1(115.06,46.48) 106.3,46.48 ; CON5.2 13.65,18.29 ; CON5.2 12.45,17.08 ; CON5.2 12.45,19.49 ; LCD1.A 26.18,62.82 ; LCD1.A 28.15,61.11 ; LCD1.A 24.21,61.11 ; LCD1.A 26.18,59.39 ; K5.2 3.83,65.19 ; K5.2 3.83,63.03 ; K5.2 4.91,64.11 ; K5.2 2.75,64.11 ; 2.75,87.73 K2.2 ; K2.2 3.83,86.65 ; K2.2 4.91,87.73 ; K2.2 3.83,88.81 ; H8.1 3.81,111 1.52,108.71 ; LCD2.A 27.7,80.6 ; LCD2.A 27.7,77.17 ; LCD2.A 26.52,78.89 v1(25.27,80.14) ; LCD2.B 52.73,80.61 ; LCD2.B 52.73,77.18 ; LCD2.B 54.69,78.9 ; LCD2.B 50.76,78.9 ; 144.32,115.58 USBH2.4 ; USBH2.4 144.32,118.12 ; USBH2.4 143.05,116.85 ; CON13.2 112.63,124.46 113.31,123.77 ; 109.86,93.19 109.03,94.02 SMART210(TINY210V2).A2 108.92,95.17 ; 80.14,94.3 v1(74.8,94.3) v1(64.83,94.3) v1(60.88,94.3) v1(58.36,94.3) v1(53.91,94.3) v1(51.05,94.3) v1(48.13,94.3) v1(45.47,94.3) 44.39,94.3 v1(43.81,93.73) v1(39.75,89.66) 35.94,85.85 v1(35.81,85.85) ; 74.81,18.86 CON4.4 ; CON4.4 76.08,17.09 ; CON4.4 76.08,20.64 ; HDMI1.21 152.98,10.92 ; HDMI1.21 151.65,13.52 ; HDMI1.21 151.65,8.32 ; HDMI1.21 150.32,10.92 ; v1(26.67,74.17) v1(26.67,71.5) v1(26.67,68.24) ; HDMI1.23 151.65,6.76 ; HDMI1.23 151.65,3.08 ; HDMI1.23 150.32,4.92 ; HDMI1.23 152.98,4.92 ; K3.2 4.91,79.86 ; K3.2 3.83,78.78 ; K3.2 2.75,79.86 ; K3.2 3.83,80.94 ; SMART210(TINY210V2).B46 132.92,41.86 v1(132.84,41.78) ; SMART210(TINY210V2).B46 132.85,43.02 131.92,42.08 ; SMART210(TINY210V2).B46 132.98,43.02 133.92,42.08 ; K6.2 4.91,56.24 ; K6.2 3.83,57.32 ; K6.2 3.83,55.16 ; K6.2 2.75,56.24 ; USBH3.4 161.62,118.22 ; USBH3.4 160.35,116.95 ; USBH3.4 161.62,115.68 ; K7.2 3.83,49.44 ; K7.2 2.75,48.36 ; K7.2 3.83,47.28 ; K1.2 3.83,96.69 ; K1.2 4.91,95.61 ; K1.2 2.75,95.61 ; K1.2 3.83,94.53 ; SMART210(TINY210V2).A69 176.89,92.02 176,92.91 ; SMART210(TINY210V2).A69 176.92,90.97 ; SMART210(TINY210V2).A69 177.97,92.02 ; 14.24,92.49 LCD4.39 LCD4.40 9.59,92.49 ; LCD4.11 14.05,64.49 ; 39.5,17.04 CON1.4 39.5,20.59 ; 51.73,61.12 LCD1.B ; LCD1.B 55.67,61.12 ; LCD1.B 53.7,62.83 ; LCD1.B 53.7,59.4 ; v1(86.25,97.8) 85.81,98.24 84.63,98.24 v1(84.36,98.5) ; 165.67,108.97 USBH4.4 ; USBH4.4 168.21,108.97 ; USBH4.4 166.94,110.24
  vias: v1(2.67,44.58) v1(2.67,40.77) v1(2.67,36.96) v1(2.67,32.51) v1(3.3,120.14) v1(3.3,116.97) v1(3.68,82.3) v1(5.46,76.83) v1(8.76,29.46) v1(8.76,25.02) v1(8.89,21.84) v1(9.02,115.06) v1(9.02,109.98) v1(9.02,104.9) v1(9.02,96.65) v1(9.02,89.03) v1(9.02,81.41) v1(9.02,76.33) v1(9.02,71.25) v1(9.02,66.17) v1(9.02,61.09) v1(9.02,56.01) v1(10.41,52.07) v1(11.18,49.28) v1(11.18,46.99) v1(11.3,44.07) v1(11.94,29.59) v1(12.83,126.49) v1(13.46,26.67) v1(14.48,52.2) v1(14.61,47.37) v1(14.73,50.29) v1(14.99,86.36) v1(14.99,60.2) v1(15.11,77.22) v1(15.11,64.9) v1(15.24,45.97) v1(15.24,43.05) v1(15.37,95.3) v1(15.49,73.66) v1(15.49,29.59) v1(15.62,94.11) v1(16,81.15) v1(16.26,69.47) v1(16.26,54.74) v1(17.02,3.05) v1(18.54,93.73) v1(18.59,117.7) v1(18.92,86.49) v1(18.97,95.86) v1(19.56,29.72) v1(21.34,37.47) v1(21.59,109.17) v1(21.59,66.93) v1(21.59,54.86) v1(21.59,48.51) v1(21.72,61.21) v1(21.72,21.21) v1(22.1,3.05) v1(22.48,74.17) v1(23.34,123.93) v1(23.5,88.14) v1(23.62,94.36) v1(23.62,85.22) v1(23.88,97.41) v1(24.26,63.88) v1(24.54,103.78) v1(24.82,116.19) v1(25.2,109.27) v1(25.4,55.12) v1(26.16,25.4) v1(26.92,58.93) v1(27.18,3.05) v1(27.69,48.51) v1(27.81,37.85) v1(28.09,103.76) v1(28.07,97.41) v1(28.07,94.11) v1(28.07,88.77) v1(28.75,108) v1(29.97,33.91) v1(29.97,32.77) v1(30.73,83.87) v1(30.99,31.5) v1(31.22,104.19) v1(31.52,116.28) v1(31.5,88.65) v1(32,58.93) v1(32.26,3.05) v1(32.38,54.99) v1(32.77,48.51) v1(32.77,21.21) v1(32.89,37.85) v1(33.22,116.31) v1(33.4,104.27) v1(33.53,93.73) v1(34.04,109.78) v1(34.67,116.46) v1(34.8,31.24) v1(36.14,116.51) v1(36.58,93.73) v1(36.78,104.6) v1(36.86,109.45) v1(37.08,58.93) v1(37.34,3.05) v1(37.69,116.46) v1(37.85,48.51) v1(37.97,37.85) v1(39.19,116.41) v1(39.75,98.93) v1(39.88,31.24) v1(39.88,25.65) v1(40.64,97.03) v1(40.67,116.36) v1(42.16,58.93) v1(42.42,3.05) v1(42.93,48.51) v1(43.05,37.85) v1(43.18,32.38) v1(47.12,116.36) v1(47.12,101.73) v1(47.24,58.93) v1(47.5,3.05) v1(48.01,90.17) v1(48.01,48.51) v1(48.13,37.85) v1(50.93,127.13) v1(51.44,90.11) v1(51.56,124.21) v1(51.69,104.14) v1(51.94,58.93) v1(52.32,76.45) v1(52.32,70.99) v1(52.32,65.15) v1(52.58,3.05) v1(53.09,48.51) v1(53.21,37.85) v1(54.18,116.46) v1(54.99,90.17) v1(55.24,31.5) v1(55.37,122.68) v1(57.02,58.93) v1(57.28,127.13) v1(57.4,76.45) v1(57.4,70.99) v1(57.4,65.15) v1(57.66,3.05) v1(58.17,48.51) v1(58.29,37.85) v1(58.72,116.59) v1(59.44,90.17) v1(60.2,31.24) v1(62.1,58.93) v1(62.36,123.32) v1(62.48,76.45) v1(62.48,70.99) v1(62.48,65.15) v1(62.74,3.05) v1(62.87,90.17) v1(63.25,48.51) v1(63.37,37.85) v1(65.28,103.38) v1(65.53,127.13) v1(67.18,58.93) v1(67.56,76.45) v1(67.56,70.99) v1(67.56,65.15) v1(67.82,3.05) v1(68.07,116.54) v1(68.33,48.51) v1(68.45,37.85) v1(69.39,98.78) v1(70.61,103.12) v1(70.99,90.17) v1(71.25,80.01) v1(72.01,84.45) v1(72.64,70.99) v1(72.64,65.15) v1(72.72,116.41) v1(72.9,76.96) v1(72.9,3.05) v1(73.15,90.17) v1(73.41,48.51) v1(73.53,37.85) v1(74.04,20.7) v1(74.04,18.41) v1(75.06,32.89) v1(75.56,78.11) v1(75.92,98.96) v1(75.95,90.17) v1(76.99,121.79) v1(76.99,117.07) v1(77.34,58.93) v1(77.72,70.99) v1(77.72,65.15) v1(77.98,3.05) v1(78.49,48.51) v1(78.61,37.85) v1(78.87,82.8) v1(78.87,76.83) v1(79.71,125.48) v1(80.67,21.41) v1(81.64,124.23) v1(81.66,79.88) v1(81.66,74.04) v1(81.92,84.71) v1(81.89,23.67) v1(82.02,100.51) v1(82.03,99.31) v1(82.3,89.53) v1(82.42,58.93) v1(82.8,115.19) v1(82.8,70.99) v1(82.8,65.15) v1(83.06,3.05) v1(83.57,48.51) v1(83.69,37.85) v1(84.26,92.58) v1(85.04,27) v1(85.22,68.58) v1(86.24,115.07) v1(86.25,100.13) v1(86.25,85.58) v1(86.25,90.63) v1(86.25,80.11) v1(87.12,119) v1(87.12,74.55) v1(87.5,58.93) v1(87.88,65.15) v1(88.04,88.84) v1(88.05,115.06) v1(88.06,96.25) v1(88.14,3.05) v1(88.35,78.27) v1(89.65,123.93) v1(89.85,105.7) v1(89.84,97.97) v1(89.85,94.37) v1(89.87,115.04) v1(89.85,87.05) v1(90.17,119.13) v1(90.78,24.56) v1(90.93,49.78) v1(91.67,125.96) v1(91.66,104.29) v1(91.66,96.18) v1(91.66,92.57) v1(91.82,15.29) v1(91.88,85.03) v1(92.71,69.37) v1(92.96,115.09) v1(93.22,3.05) v1(93.34,21.56) v1(93.47,122.68) v1(93.47,102.36) v1(93.47,90.93) v1(93.47,7.75) v1(93.6,94.23) v1(94.36,37.72) v1(94.49,48.39) v1(95.12,120.52) v1(95.53,24.84) v1(96.15,114.98) v1(96.52,74.68) v1(96.9,69.37) v1(97,80.65) v1(97.28,122.68) v1(97.79,27.05) v1(97.92,119.25) v1(97.92,20.19) v1(97.92,15.49) v1(98.3,3.05) v1(98.42,83.57) v1(98.42,63.27) v1(98.53,112.04) v1(98.81,43.43) v1(99.59,125.98) v1(100,40.23) v1(100.94,113.08) v1(101.09,123.32) v1(101.47,119.51) v1(101.46,115.99) v1(101.47,69.47) v1(101.6,80.65) v1(102.36,48.51) v1(102.62,74.68) v1(103,7.11) v1(103.12,20.19) v1(103.25,15.11) v1(103.38,63.27) v1(103.38,3.05) v1(104.14,94.61) v1(104.27,122.05) v1(104.52,77.6) v1(105.28,119.51) v1(105.38,8.79) v1(107.06,121.41) v1(107.06,53.98) v1(107.06,43.43) v1(107.22,58.76) v1(107.57,74.68) v1(107.57,69.37) v1(108.33,63.27) v1(109.09,123.32) v1(109.35,7.11) v1(109.35,3.05) v1(109.98,109.35) v1(110.62,107.31) v1(110.87,55.88) v1(111.51,41.78) v1(111.78,83.46) v1(111.96,92.99) v1(112.65,41.45) v1(112.9,69.47) v1(113.46,95.81) v1(113.54,3.05) v1(113.97,92.99) v1(114.3,12.52) v1(114.55,17.91) v1(114.94,56.01) v1(115.06,113.16) v1(115.7,105.03) v1(115.7,95.1) v1(115.7,6.48) v1(115.95,93.07) v1(115.95,63.27) v1(116.33,52.17) v1(116.51,18.06) v1(116.48,11.91) v1(116.59,116.08) v1(116.59,24.26) v1(116.71,126.24) v1(116.97,124.71) v1(117.35,119) v1(117.37,77.87) v1(117.6,54.08) v1(117.73,95.89) v1(117.98,114.81) v1(118.03,93.01) v1(118.87,55.91) v1(119,83.57) v1(119.51,46.86) v1(119.87,95.99) v1(119.89,3.17) v1(120.14,16) v1(120.14,9.02) v1(120.27,120.26) v1(120.27,75.06) v1(120.5,90.37) v1(120.65,57.91) v1(121.16,18.03) v1(121.41,21.21) v1(121.54,109.35) v1(121.82,93.01) v1(121.92,96.01) v1(121.94,69.49) v1(122.02,80.59) v1(122,41.33) v1(122.56,18.03) v1(123.09,72.16) v1(123.32,10.92) v1(123.32,5.84) v1(123.42,83.46) v1(123.57,54.36) v1(123.57,46.86) v1(123.95,96.01) v1(123.95,63.27) v1(124.46,120.17) v1(124.82,77.77) v1(124.97,3.17) v1(125.09,80.65) v1(125.73,39.88) v1(125.82,69.43) v1(125.98,96.01) v1(125.96,93.07) v1(126.62,116.08) v1(126.95,89.26) v1(127.53,74.93) v1(127.64,54.23) v1(127.69,95.38) v1(127.84,92.99) v1(127.76,50.67) v1(128.27,69.37) v1(128.4,90.93) v1(128.4,37.34) v1(129.03,40.39) v1(129.29,57.91) v1(130.05,3.17) v1(130.18,69.37) v1(130.35,96.47) v1(131.32,50.55) v1(131.57,109.35) v1(131.57,104.9) v1(131.57,101.09) v1(131.57,26.8) v1(132.21,10.92) v1(132.21,5.84) v1(132.84,37.08) v1(133.48,74.68) v1(133.6,83.46) v1(133.73,63.27) v1(134.01,115.09) v1(134.24,112.78) v1(134.49,52.58) v1(135.13,3.17) v1(135.59,102.41) v1(135.64,39.5) v1(135.69,104.17) v1(135.97,83.36) v1(136.91,90.47) v1(137.03,111.76) v1(137.13,107.9) v1(137.13,98.78) v1(137.29,110.62) v1(137.29,41.66) v1(137.67,63.27) v1(137.67,25.27) v1(137.67,21.97) v1(137.92,36.7) v1(138.63,53.92) v1(138.71,83.29) v1(138.81,80.65) v1(138.79,50.27) v1(139.12,107.16) v1(139.09,104.65) v1(139.14,100.48) v1(139.19,110.62) v1(139.37,86.74) v1(140.21,3.17) v1(140.34,23.5) v1(140.46,113.16) v1(140.46,37.08) v1(140.46,7.11) v1(140.59,28.96) v1(140.72,69.37) v1(141,77.83) v1(141,48.26) v1(141.78,91.03) v1(141.88,87.6) v1(141.99,80.65) v1(142.82,110.34) v1(142.77,64.26) v1(142.88,21.84) v1(142.95,48.18) v1(143,24.77) v1(143.13,37.21) v1(144.91,74.68) v1(144.88,65.74) v1(144.91,39.5) v1(144.91,7.11) v1(145.16,18.92) v1(145.29,3.17) v1(145.54,125.86) v1(145.54,28.96) v1(145.8,23.37) v1(145.92,80.65) v1(145.92,43.94) v1(145.92,26.04) v1(146.18,120.78) v1(146.18,50.93) v1(146.91,90.07) v1(147.29,77.88) v1(147.45,41.27) v1(147.46,96.92) v1(147.7,85.09) v1(147.83,124.33) v1(147.83,21.34) v1(147.96,28.7) v1(147.96,25.4) v1(148.77,100.71) v1(149.33,108.92) v1(149.35,7.11) v1(149.73,121.03) v1(149.86,23.11) v1(149.99,83.31) v1(149.99,28.57) v1(149.99,26.67) v1(149.99,18.54) v1(150.37,3.17) v1(150.62,107.34) v1(150.62,104.11) v1(150.6,74.68) v1(151,50.93) v1(151,14.48) v1(151.38,119) v1(151.38,61.09) v1(151.38,56.52) v1(151.76,121.03) v1(151.89,125.86) v1(152.15,80.77) v1(152.17,105.82) v1(152.22,90.02) v1(152.68,104.09) v1(153.8,107.37) v1(153.89,96.95) v1(153.92,36.58) v1(154.05,68.71) v1(155.07,114.43) v1(155.07,64.52) v1(155.09,50.11) v1(155.45,3.17) v1(155.5,22.86) v1(156.08,89.92) v1(156.46,51.94) v1(156.84,85.6) v1(156.97,116.97) v1(157.99,81.92) v1(158.24,124.59) v1(158.62,77.34) v1(158.62,36.32) v1(158.75,41.02) v1(159,23.27) v1(159.89,89.66) v1(160.15,115.06) v1(160.15,53.98) v1(160.53,3.17) v1(161.54,74.42) v1(161.54,69.34) v1(161.54,64.26) v1(162.15,22.02) v1(162.43,50.6) v1(163.07,27.28) v1(163.19,99.19) v1(163.19,82.04) v1(163.32,37.34) v1(163.96,124.59) v1(163.96,89.53) v1(164.95,103.81) v1(165.13,107.16) v1(165.23,120.78) v1(165.4,110.01) v1(165.48,40.39) v1(165.61,3.17) v1(166.52,21.84) v1(166.75,79.63) v1(166.75,74.55) v1(166.75,69.47) v1(166.75,64.39) v1(166.75,59.31) v1(167.18,29.46) v1(167.77,124.59) v1(168.02,86.11) v1(168.2,52.07) v1(168.4,89.66) v1(168.4,46.23) v1(168.96,121.16) v1(170.43,37.85) v1(170.94,127.13) v1(171.02,11.18) v1(171.3,40.26) v1(171.58,108.08) v1(171.58,103) v1(171.58,30.61) v1(171.58,24.89) v1(172.34,79.76) v1(172.34,74.68) v1(172.34,69.6) v1(172.34,64.52) v1(172.34,59.44) v1(172.34,54.36) v1(172.34,50.29) v1(172.72,40.77) v1(173.48,16.64) v1(173.48,10.92) v1(173.99,33.15) v1(174.12,100.46) v1(175.39,40.89) v1(176.02,27.43) v1(176.4,84.84) v1(176.4,79.76) v1(176.4,74.68) v1(176.4,69.6) v1(176.4,64.52) v1(176.4,59.44) v1(176.4,54.36) v1(176.4,50.16) v1(176.66,90.3) v1(177.29,115.06) v1(177.29,109.35) v1(177.29,103.63) v1(177.29,100.46) v1(177.67,40.64) v1(177.93,27.43) v1(177.93,19.81) v1(177.93,13.46) v1(178.1,121.06) v1(178.56,34.95)
